# Altium PCB PCB1.PcbDoc (part 1 of 4)
Units mm, origin at the board's own origin, x right, y up, seen from the top; angles counter-clockwise.
Board outline 45.9 x 24.5 mm, 4 copper layers (Top Layer, Signal Layer 1, Signal Layer 2, Bottom Layer), stack 1.021 mm thick; 157 components, 126 nets, 564 pads, 199 vias.
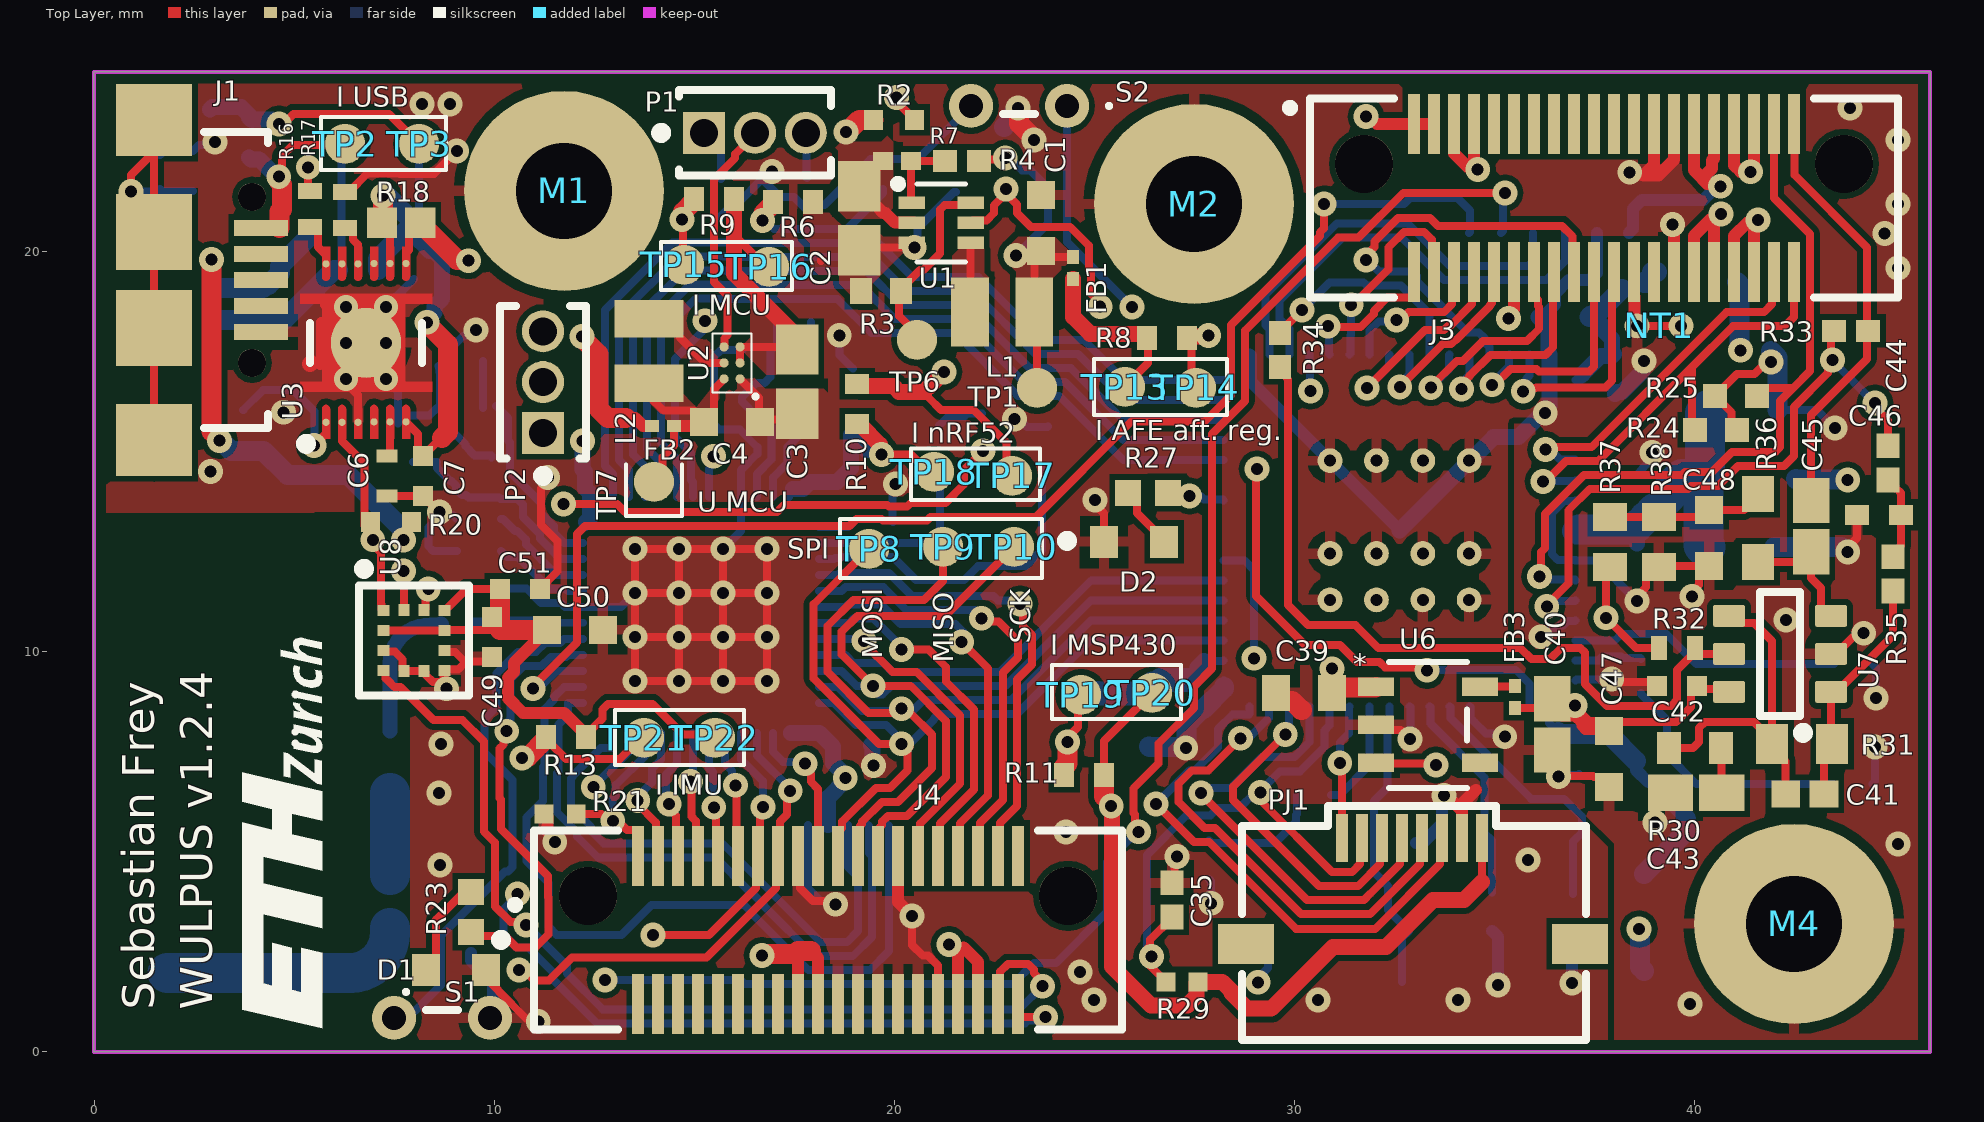
[diagram p0: Top Layer view]
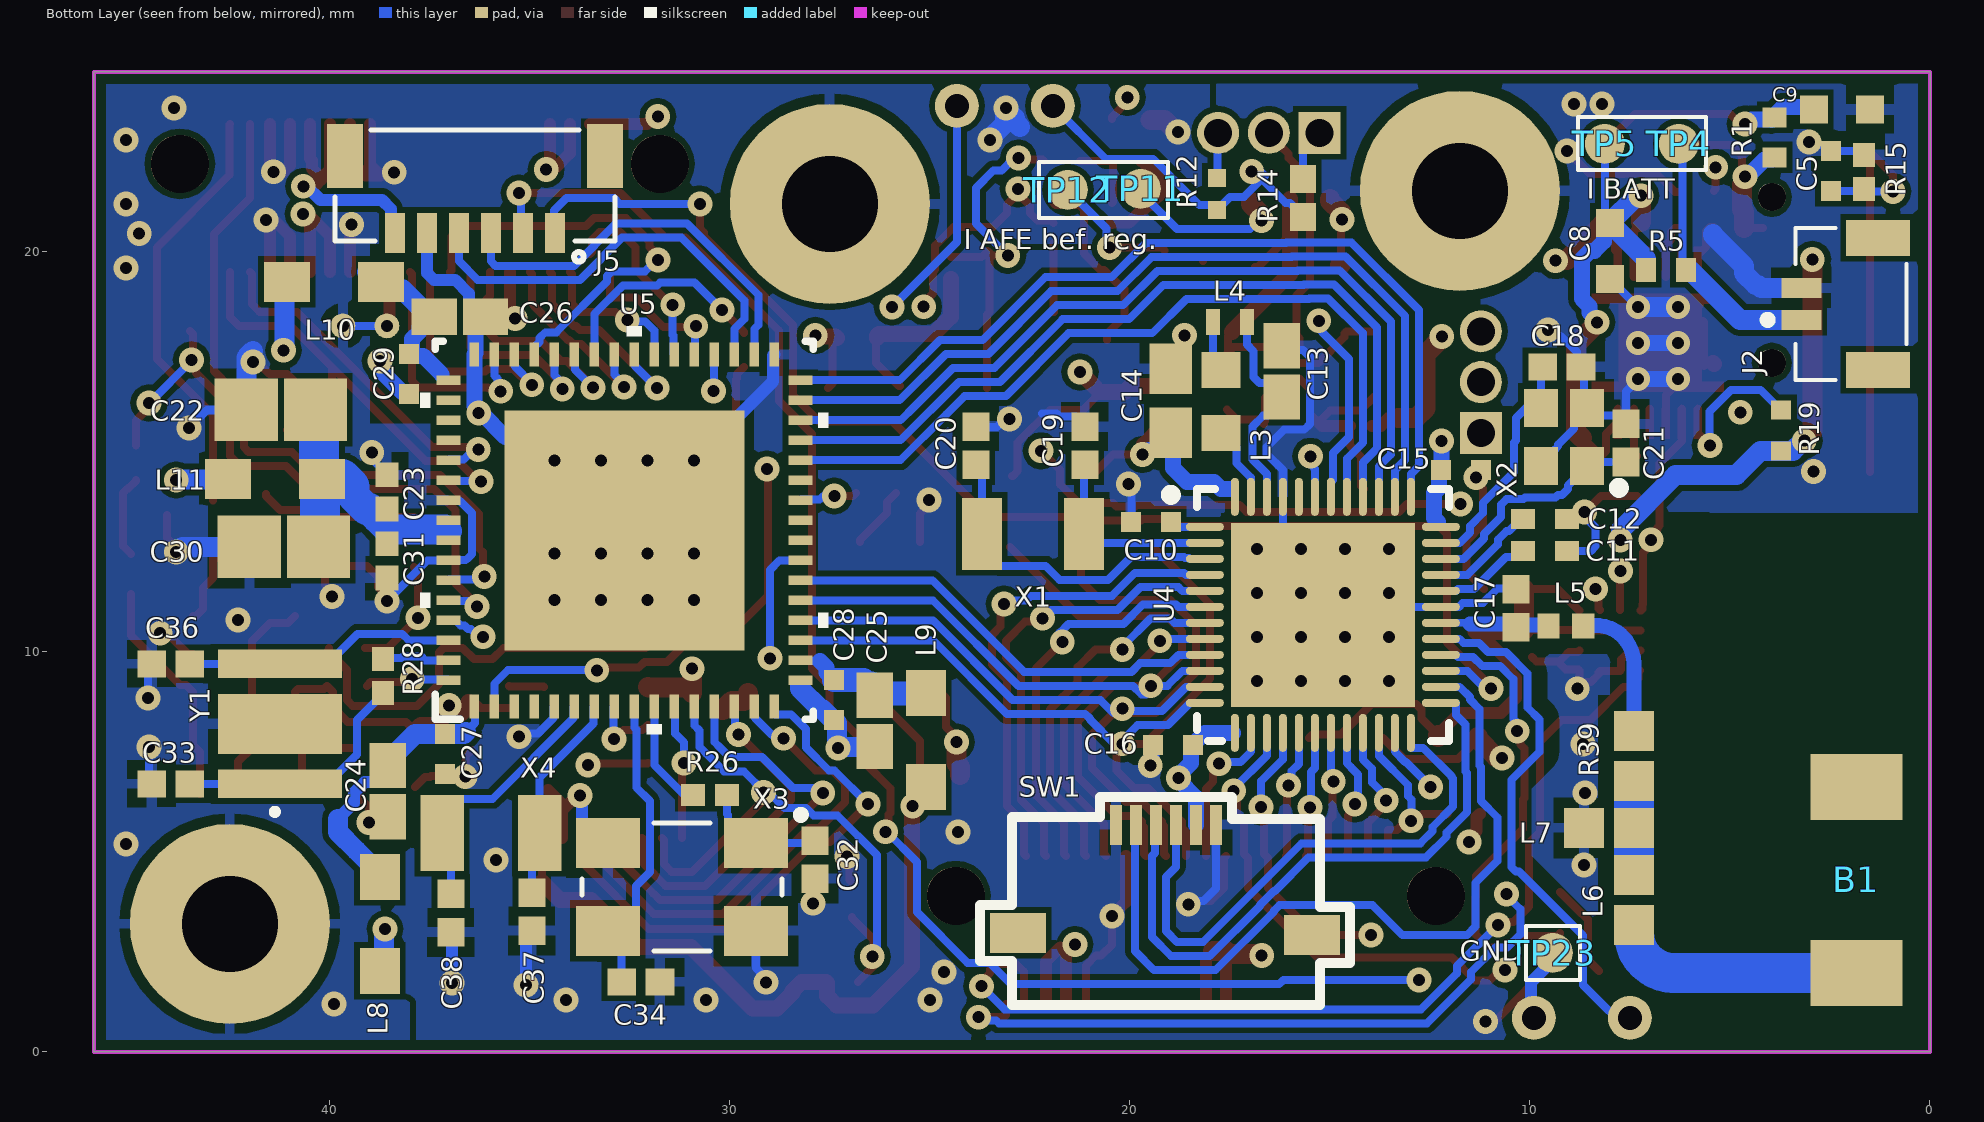
[diagram p1: Bottom Layer view, seen from below]
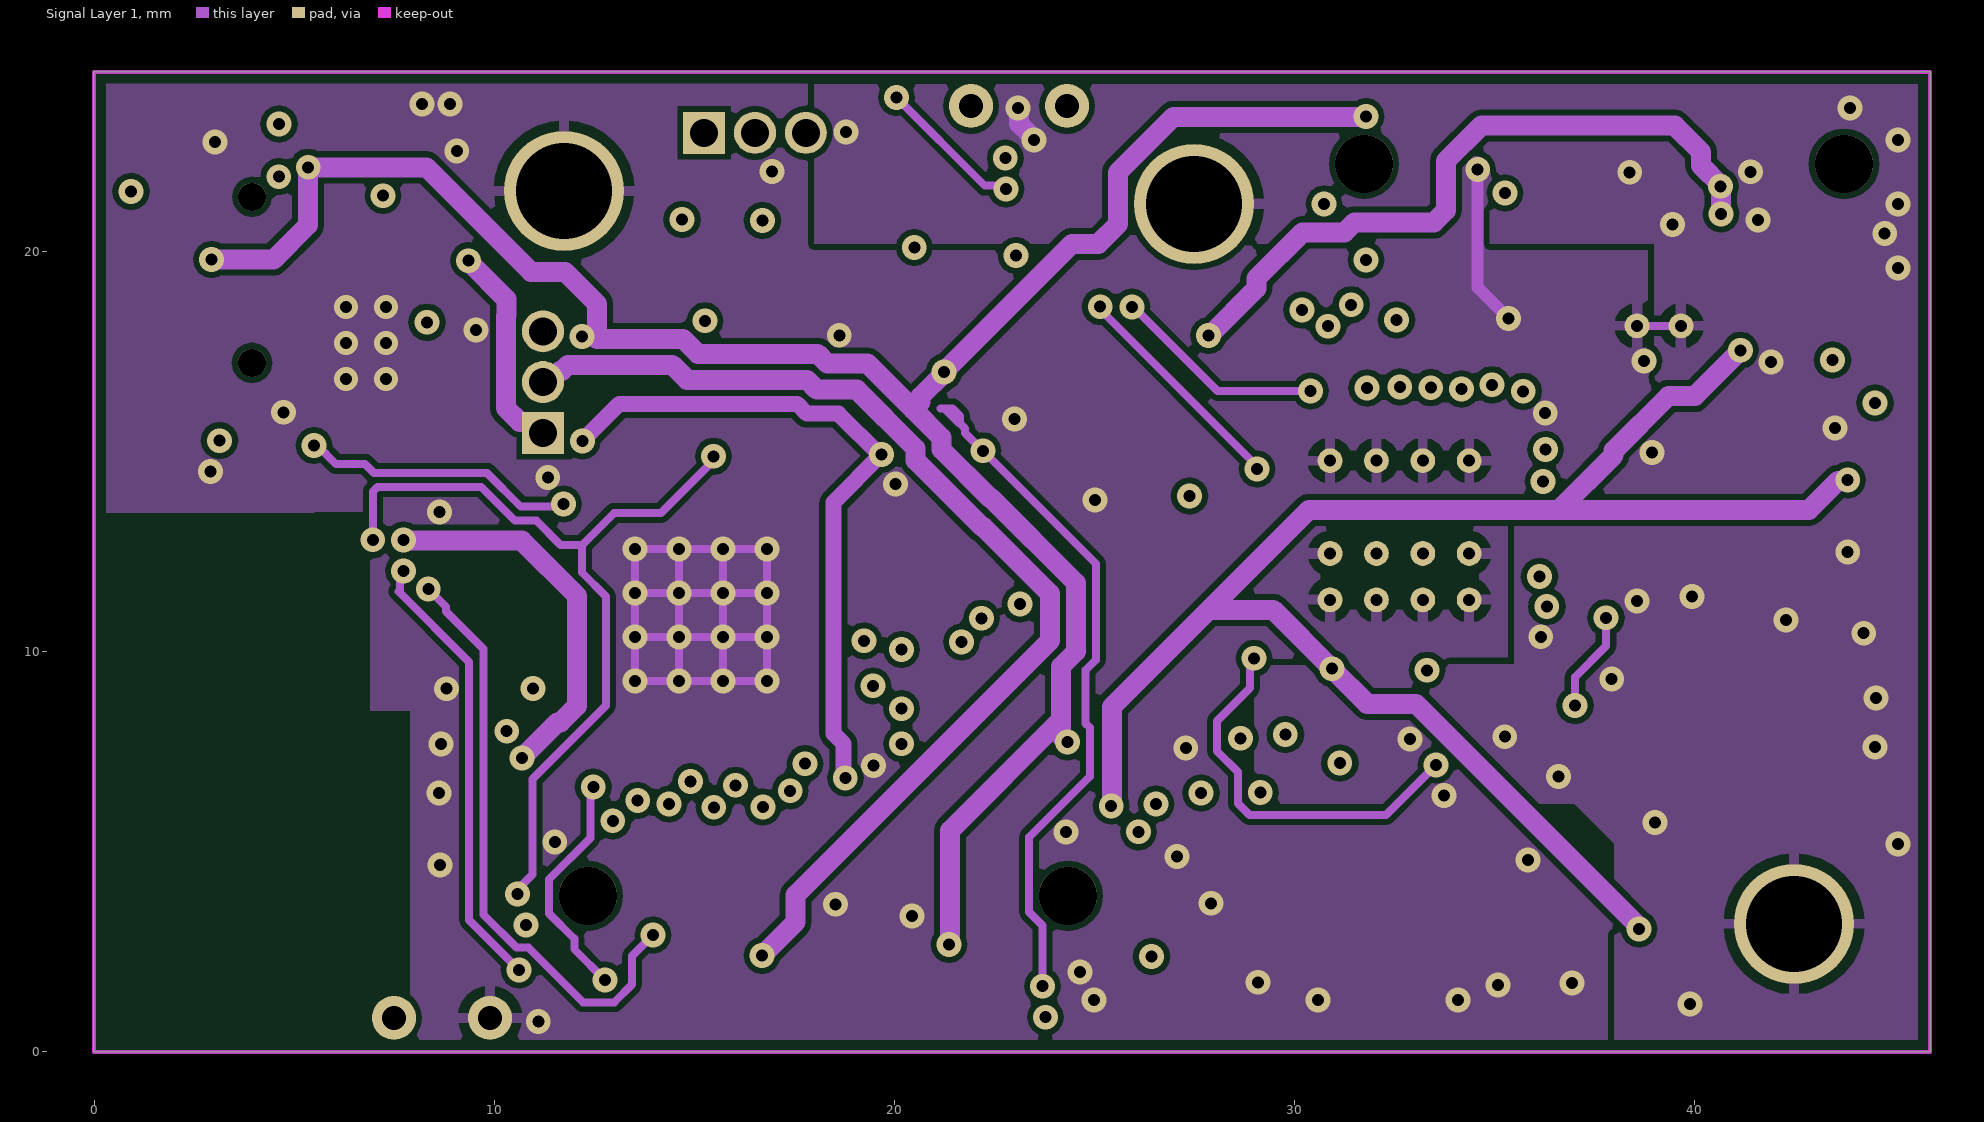
[diagram p2: Signal Layer 1]
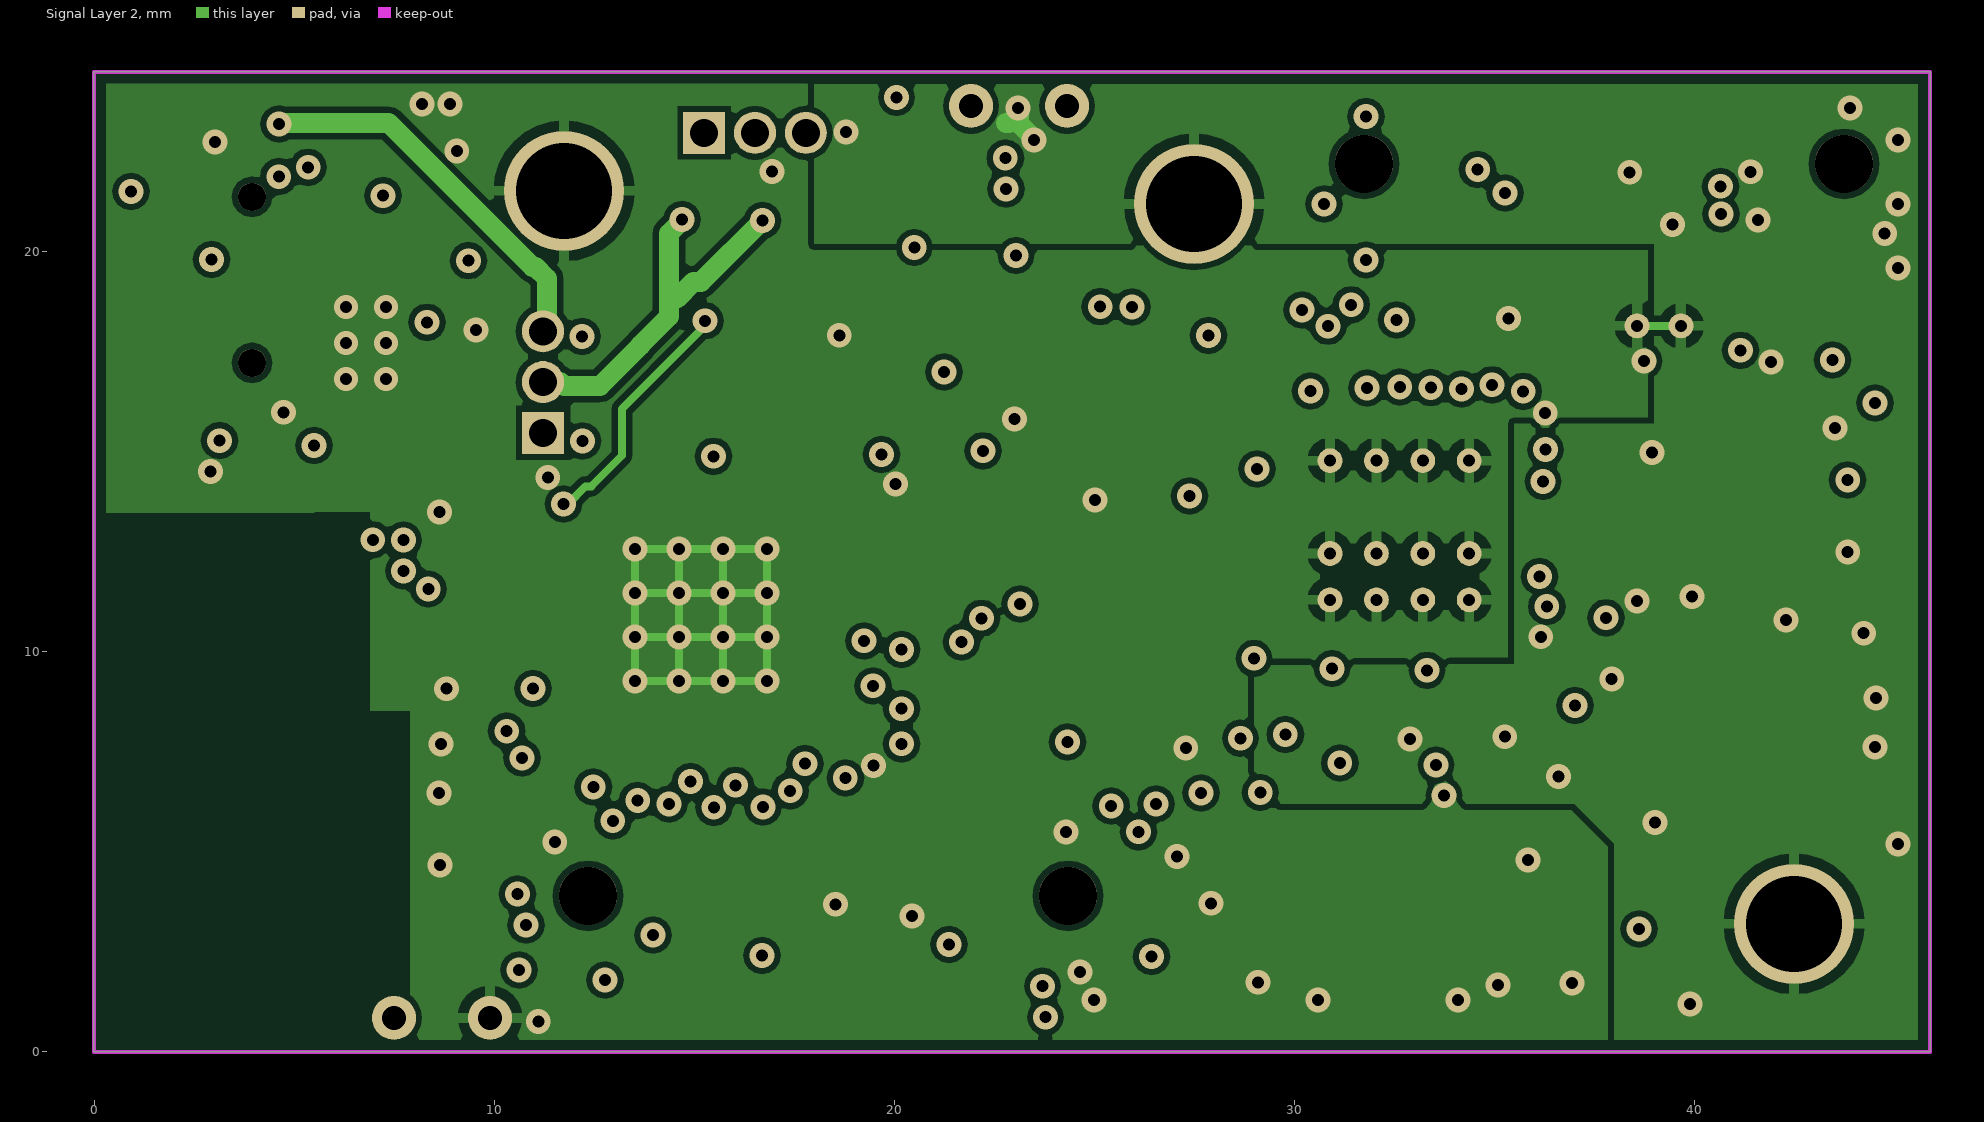
[diagram p3: Signal Layer 2]
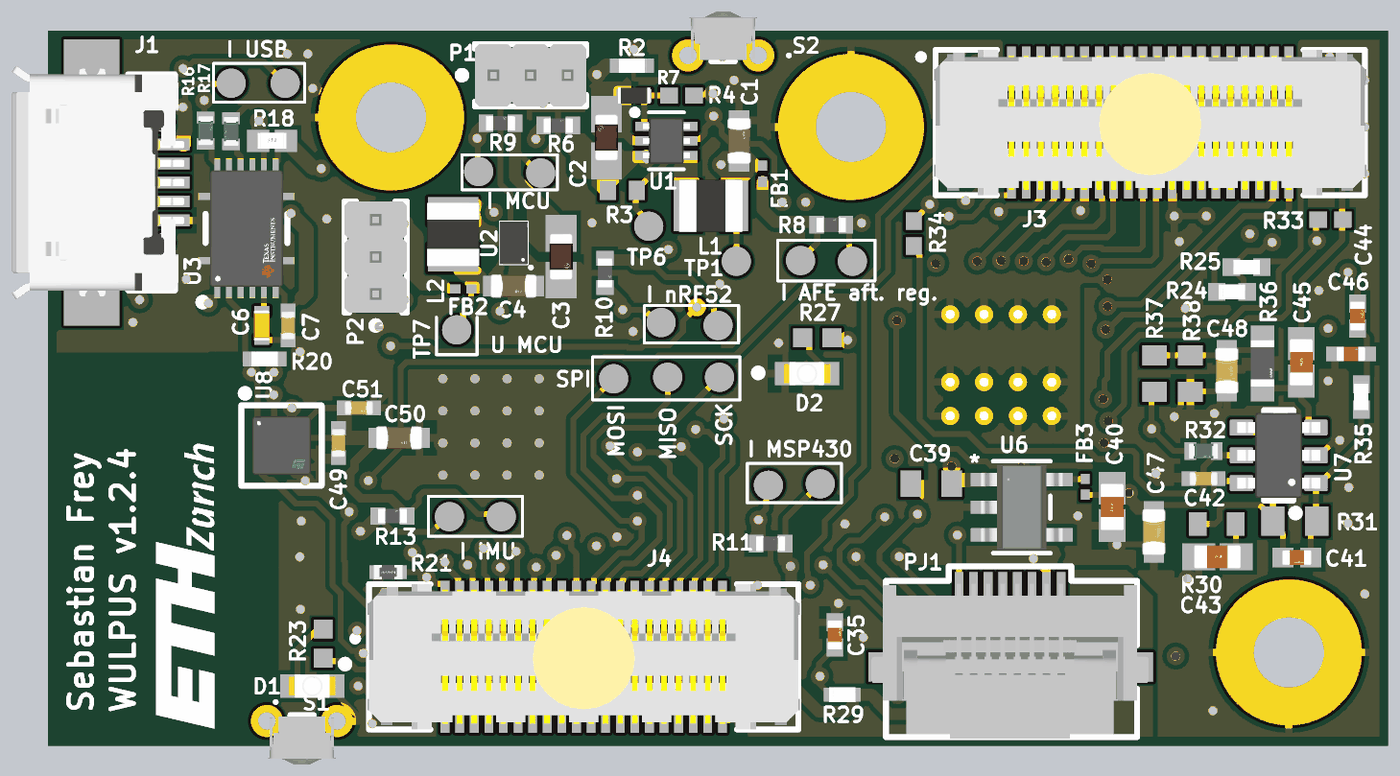
[diagram p6: 3D render of the assembled board from above, using the file's embedded part models]
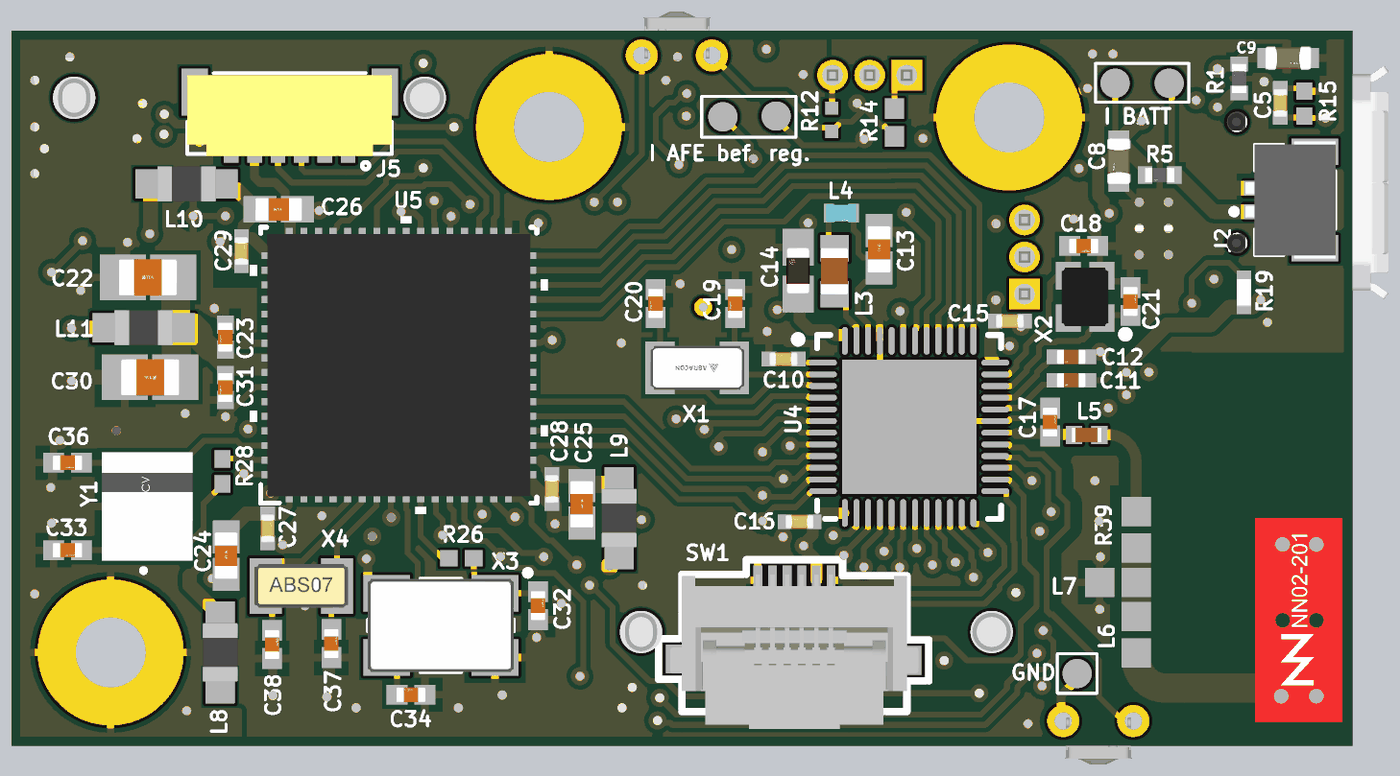
[diagram p7: 3D render of the assembled board from below, using the file's embedded part models]

## Layer stack, top to bottom
Top Solder: solder mask 0.0102, Solder Resist, Dk 3.5
Top Layer: signal copper 0.035
Dielectric 1: prepreg 0.2104, PP, Dk 4.36
Signal Layer 1: signal copper 0.0152
Dielectric 3: core 0.5, Core, Dk 4.6
Signal Layer 2: signal copper 0.0152
Dielectric 2: prepreg 0.2104, PP, Dk 4.36
Bottom Layer: signal copper 0.035
Bottom Solder: solder mask 0.0102, Solder Resist, Dk 3.5

## Board outline
-0.004,0 45.9,0 45.9,24.5 -0.004,24.5

## Design rules (kind name [scope] priority, off if disabled: settings)
BoardOutlineClearance [Not OnSilkscreen] p1: gap=0.3 ignorepadtopadclearanceinfootprint=FALSE
Clearance Clearance_polygon_rf [InNamedPolygon('NONET_L-01_P-001')] p1: gap=0.4 ignorepadtopadclearanceinfootprint=FALSE
Clearance Clearance_1 [All] p2: gap=0.15 ignorepadtopadclearanceinfootprint=FALSE except(0: Arc-Hole Track-Hole SMDPad-Hole THPad-Hole Via-Hole Text-Hole)
HoleSize [All] p1: absolutevalues=TRUE maxlimit=2.54 minlimit=0.2 maxpercent=80.000 minpercent=20.000
PolygonConnect PolygonConnect_9 [All vs IsNamedPolygon('VSYS_3V3_IN_L01_P022')] p1: connectstyle=Direct reliefconductorwidth=0.254 reliefentries=4 polygonreliefangle="90 Angle" airgapwidth=0.254
PolygonConnect PolygonConnect_8 [All vs IsNamedPolygon('USS_GND_L01_P021')] p2: connectstyle=Direct reliefconductorwidth=0.254 reliefentries=4 polygonreliefangle="90 Angle" airgapwidth=0.254
PolygonConnect PolygonConnect_7 [All vs IsNamedPolygon('NETL1_1_L01_P020')] p3: connectstyle=Direct reliefconductorwidth=0.254 reliefentries=4 polygonreliefangle="90 Angle" airgapwidth=0.254
PolygonConnect PolygonConnect_6 [All vs IsNamedPolygon('NETC1_1_L01_P019')] p4: connectstyle=Direct reliefconductorwidth=0.254 reliefentries=4 polygonreliefangle="90 Angle" airgapwidth=0.254
PolygonConnect PolygonConnect_5 [All vs IsNamedPolygon('NETL2_1_L01_P016')] p5: connectstyle=Direct reliefconductorwidth=0.254 reliefentries=4 polygonreliefangle="90 Angle" airgapwidth=0.254
PolygonConnect PolygonConnect_4 [All vs IsNamedPolygon('VSYS_MCU_IN_L01_P018')] p6: connectstyle=Direct reliefconductorwidth=0.254 reliefentries=4 polygonreliefangle="90 Angle" airgapwidth=0.254
PolygonConnect PolygonConnect_3 [All vs IsNamedPolygon('NETL2_1_L01_P016')] p7: thpad.connectstyle=Direct thpad.reliefconductorwidth=0.254 thpad.reliefentries=4 thpad.polygonreliefangle="90 Angle" thpad.airgapwidth=0.254 smdpad.connectstyle=Relief smdpad.reliefconductorwidth=0.254 smdpad.reliefentries=4 smdpad.polygonreliefangle="90 Angle" smdpad.airgapwidth=0.254 via.connectstyle=Relief via.reliefconductorwidth=0.254 via.reliefentries=4 via.polygonreliefangle="90 Angle" via.airgapwidth=0.254
PolygonConnect PolygonConnect_2 [All vs IsNamedPolygon('NETC4_1_L01_P015')] p8: connectstyle=Direct reliefconductorwidth=0.254 reliefentries=4 polygonreliefangle="90 Angle" airgapwidth=0.254
PolygonConnect PolygonConnect_1 [All vs IsNamedPolygon('GND_L01_P001')] p9: connectstyle=Direct reliefconductorwidth=0.254 reliefentries=4 polygonreliefangle="90 Angle" airgapwidth=0.254
PolygonConnect [All] p10: connectstyle=Relief reliefconductorwidth=0.254 reliefentries=4 polygonreliefangle="90 Angle" airgapwidth=0.254
RoutingVias [All] p1: holewidth=0.3 width=0.62 viastyle="Through Hole" minholewidth=0.3 minwidth=0.62 maxholewidth=0.3 maxwidth=0.62
SilkToSilkClearance [All] p1: silktosilkclearance=0.01
SilkToSolderMaskClearance [IsPad] p1: minsilkscreentomaskgap=0.01 clearancetoexposedcopper=TRUE
SolderMaskExpansion [All] p1: expansion=0.102 istentingtop=FALSE
Width [All] p1: maxlimit=25 minlimit=0.15 preferedwidth=0.2 toplayer_maxwidth=2.5 midlayer1_maxwidth=2.5 midlayer2_maxwidth=2.5 minimp=50.000000 maximp=50.000000 favimp=50.000000
27 further rules are at their usual default settings.

## Classes and differential pairs
component class 05_IMU: C49 C50 C51 U8
component class 04_MR_WOLF: J4
component class 03_MSP430_AFE: C39 C40 C41 C42 C43 C44 C45 C46 C47 C48 FB3 J3 R30 R31 R32 R33 R34 R35 R36 R37 R38 U6 U7
component class 02_MSP430: C22 C23 C24 C25 C26 C27 C28 C29 C30 C31 C32 C33 C34 C35 C36 C37 C38 D2 L8 L9 L10 L11 PJ1 R24 R25 R26 R27 R28 R29 S2 TP8 TP9 TP10 U5 X3 X4 Y1 Y2 Y3
component class 01_NRF52: B1 C10 C11 C12 C13 C14 C15 C16 C17 C18 C19 C20 C21 D1 J5 L3 L4 L5 L6 L7 R21 R23 R39 S1 SW1 U4 X1 X2
component class 00_POWER: C1 C2 C3 C4 C5 C6 C7 C8 C9 FB1 FB2 J1 J2 L1 L2 M1 M2 M4 NT1 P1 P2 R1 R2 R3 R4 R5 R6 R7 R8 R9 R10 R11 R12 R13 R14 R15 R16 R17 R18 R19 R20 TP1 TP2 TP3 TP4 TP5 TP6 TP7 TP11 TP12 TP13 TP14 TP15 TP16 TP17 TP18 TP19 TP20 TP21 TP22 TP23 U1 U2 U3

## Components (designator, comment, footprint, x,y, rotation, side; value= is the part's Value field where it differs from the comment)
B1 "NN02-201" NN02201 1.84,4.3 r90 bottom
C1 "C1608X5R1A106K080AC" FP-C1608-080-MFG 23.675,20.725 r90 top value=10uF
C2 "EMK107ABJ475KA-T" FP-0603-L_1_6_0_15-W_0_8-IPC_A 19.13,20.841 r90 top
C3 "EMK107ABJ475KA-T" FP-0603-L_1_6_0_15-W_0_8-IPC_A 17.575,16.755 r270 top
C4 "C1608X5R1A106K080AC" FP-C1608-080-MFG 15.95,15.75 r0 top value=10uF
C5 "CC0402KRX7R7BB104" FP-CC0402-MFG 2.475,22.025 r270 bottom value="100 nF"
C6 "C1005X5R1E474K050BB" CAPC1050X55X10LL05 7.325,14.4 r90 top
C7 "CC0402KRX5R5BB105" FP-CC0402-MFG 8.225,14.4 r270 top value="1 uF"
C8 "C1608X5R1A106K080AC" FP-C1608-080-MFG 8,20.025 r270 bottom value=10uF
C9 "C1608X5R1A106K080AC" FP-C1608-080-MFG 2.2,23.56 r180 bottom value=10uF
C10 "CC0402KRX7R7BB104" FP-CC0402-MFG 19.475,13.25 r0 bottom value="100 nF"
C11 "not mounted" FP-04025A101JAT2A-MFG 9.625,12.525 r0 bottom
C12 "04025A101JAT2A" FP-04025A101JAT2A-MFG 9.625,13.325 r0 bottom
C13 "C1608X7R1C105K080AC" FP-C1608-080-0_1-IPC_B 16.2,17.009 r270 bottom
C14 "EMK107ABJ475KA-T" FP-0603-L_1_6_0_15-W_0_8-IPC_A 18.975,16.277 r90 bottom
C15 "CC0402KRX7R7BB104" FP-CC0402-MFG 11.725,14.55 r180 bottom value="100 nF"
C16 "CC0402KRX7R7BB104" FP-CC0402-MFG 18.925,7.675 r0 bottom value="100 nF"
C17 "GJM1555C1HR80WB01D" FP-GJM155-0_05-IPC_A 10.35,11.09 r90 bottom
C18 "GJM1555C1H120GB01D" FP-GJM155-0_05-IPC_A 9.2,17.125 r180 bottom
C19 "GJM1555C1H120GB01D" FP-GJM155-0_05-IPC_A 21.125,15.154 r270 bottom
C20 "GJM1555C1H120GB01D" FP-GJM155-0_05-IPC_A 23.85,15.154 r270 bottom
C21 "GJM1555C1H120GB01D" FP-GJM155-0_05-IPC_A 7.6,15.225 r90 bottom
C22 "C2012X5R1A336M125AC" FP-C2012-125-0_2-IPC_A 41.225,16.05 r180 bottom
C23 "GRM1555C1H102JA01D" FP-GRM155-0_05-IPC_B 38.575,14 r270 bottom
C24 "C1608X7R1C105K080AC" FP-C1608-080-0_1-IPC_B 38.55,6.516 r270 bottom
C25 "C1608X7R1C105K080AC" FP-C1608-080-0_1-IPC_B 26.375,8.275 r270 bottom
C26 "C1608X7R1C105K080AC" FP-C1608-080-0_1-IPC_B 36.75,18.375 r180 bottom
C27 "CC0402KRX7R7BB104" FP-CC0402-MFG 37.125,7.45 r90 bottom value="100 nF"
C28 "CC0402KRX7R7BB104" FP-CC0402-MFG 27.4,8.8 r90 bottom value="100 nF"
C29 "CC0402KRX7R7BB104" FP-CC0402-MFG 38.025,16.95 r90 bottom value="100 nF"
C30 "C2012X5R1A336M125AC" FP-C2012-125-0_2-IPC_A 41.15,12.625 r0 bottom
C31 "GRM1555C1H102JA01D" FP-GRM155-0_05-IPC_B 38.575,12.275 r270 bottom
C32 "GJM1555C1H120GB01D" FP-GJM155-0_05-IPC_A 27.875,4.804 r90 bottom
C33 "GJM1555C1H120GB01D" FP-GJM155-0_05-IPC_A 43.979,6.7 r180 bottom
C34 "GJM1555C1H120GB01D" FP-GJM155-0_05-IPC_A 32.225,1.75 r0 bottom
C35 "GRM1555C1H102JA01D" FP-GRM155-0_05-IPC_B 26.95,3.8 r90 top
C36 "GJM1555C1H120GB01D" FP-GJM155-0_05-IPC_A 43.979,9.7 r180 bottom
C37 "GJM1555C1H120GB01D" FP-GJM155-0_05-IPC_A 34.95,3.504 r90 bottom
C38 "GJM1555C1H120GB01D" FP-GJM155-0_05-IPC_A 36.975,3.471 r90 bottom
C39 "C1608X5R1A106K080AC" CAPC0603(1608)100_L 30.25,8.975 r0 top value=10uF
C40 "C1608X7R1C105K080AC" FP-C1608-080-0_1-IPC_B 36.45,8.184 r90 top
C41 "GJM1555C1H120GB01D" FP-GJM155-0_05-IPC_A 42.771,6.45 r0 top
C42 "CC0402KRX7R7BB104" FP-CC0402-MFG 39.575,9.15 r180 top value="100 nF"
C43 "C1608X7R1C105K080AC" FP-C1608-080-0_1-IPC_B 40.05,6.475 r180 top
C44 "GRM1555C1H102JA01D" FP-GRM155-0_05-IPC_B 44.85,14.725 r90 top
C45 "C1608X7R1C105K080AC" FP-C1608-080-0_1-IPC_B 42.925,13.141 r270 top
C46 "04025A101JAT2A" FP-04025A101JAT2A-MFG 44.625,13.425 r0 top
C47 "GRM188R61C225KE15D" FP-CGA3E-0_3-0_1-MFG 37.875,7.325 r270 top
C48 "GRM188R61C225KE15D" FP-CGA3E-0_3-0_1-MFG 40.375,12.85 r270 top
C49 "CC0402KRX7R7BB104" FP-CC0402-MFG 9.95,10.375 r270 top value="100 nF"
C50 "C1608X5R1A106K080AC" FP-C1608-080-MFG 12.025,10.55 r0 top value=10uF
C51 "CC0402KRX7R7BB104" FP-CC0402-MFG 10.65,11.575 r0 top value="100 nF"
D1 "APHD1608LZGCK" FP-APHD1608LZGCK-MFG 9.05,2.05 r180 top
D2 "APHD1608LZGCK" FP-APHD1608LZGCK-MFG 26,12.75 r0 top
FB1 "BLM03AX800SN1D" MURA-BLM03-CHIP-2_V 24.475,19.6 r270 top
FB2 "BLM03AX800SN1D" MURA-BLM03-CHIP-2_V 14.225,15.65 r180 top
FB3 "BLM03AX800SN1D" MURA-BLM03-CHIP-2_V 35.525,8.875 r270 top
J1 "629105136821" 629105136821 1.5,19.3 r270 top
J2 "DF52-2S-0.8H(21)" DF522S08H21 2.325,18.7 r90 bottom
J3 "LSHM-120-02.5-L-DV-A-N-K-TR" SAMTEC_LSHM-120-XX.X-X-DV-A-N-XX 37.75,21.35 r180 top
J4 "LSHM-120-02.5-L-DV-A-N-K-TR" SAMTEC_LSHM-120-XX.X-X-DV-A-N-XX 18.35,3.05 r180 top
J5 "DF52-6S-0.8H(21)" HIROSE_DF52-6S-0.8H(21) 36.375,20.475 r0 bottom
L1 "DFE201612E-2R2M=P2" INDC2016X10L 22.705,18.5 r0 top value=2.2uH
L2 "DFE201612E-2R2M=P2" INDC2016X10L 13.875,17.52 r270 top value=2.2uH
L3 "L0603B100KDWFT" L0603B100KDWFT 17.725,16.26 r90 bottom
L4 "LQW15AN15NJ00D" FP-LQW15AN_00-W0_6-0_1-MFG 17.5,18.25 r180 bottom
L5 "LQG15HS3N9B02D" INDC1005X45N 9.1,10.65 r180 bottom
L6 "LQW15AN3N6G80D" Component_0402_0603 7.4,3.8 r270 bottom
L7 "LQW15AN3N6G80D" Component_0402_0603 8.025,5.6 r0 bottom
L8 "742792040" SMD-0805 38.75,3.2 r90 bottom
L9 "742792040" SMD-0805 25.1,7.8 r90 bottom
L10 "742792040" SMD-0805 39.9,19.25 r180 bottom
L11 "742792040" SMD-0805 41.375,14.325 r180 bottom
M1 "Mounting Hole for mr Wolf PCB" "Hole M2" 11.75,21.525 r0 top
M2 "Mounting Hole for AFE PCB" "Hole M2" 27.5,21.2 r0 top
M4 "Mounting Hole for AFE PCB" "Hole M2" 42.5,3.2 r0 top
NT1 "Net Tie" Net_Tie_Top_Bottom 39.175,18.15 r180 top net-tie
P1 "GRPB031VWVN-RC" SLIN-GRPB031VWVN-RC_V 16.525,22.975 r0 top
P2 "GRPB031VWVN-RC" SLIN-GRPB031VWVN-RC_V 11.225,16.745 r90 top
PJ1 "5051100892" MOLEX_5051100892 32.95,3.9 r180 top
R1 "ERJ-2BWFR100X" FP-CSR0402-MFG 3.88,22.86 r90 bottom
R2 "CR0402-JW-105GLF" FP-CR0402-MFG 20,23.3 r180 top
R3 "not mounted" RESC0402(1005)_N 19.675,19.025 r180 top value=499K
R4 "RC0402FR-07453KL" RESC1005X40X25NL05T10 21.7,22.275 r0 top
R5 "ERJ-2BWFR100X" FP-CSR0402-MFG 6.6,19.55 r0 bottom
R6 "ERJ-2BWFR100X" FP-CSR0402-MFG 17.475,21.25 r0 top
R7 "RMCF0402FT100K" RESC1005X40X25LL10T15 20.075,22.275 r0 top
R8 "ERJ-2BWFR100X" FP-CSR0402-MFG 26.825,17.85 r0 top
R9 "ERJ-2BWFR100X" FP-CSR0402-MFG 15.5,21.325 r0 top
R10 "ERJ-2BWFR100X" FP-CSR0402-MFG 19.075,16.2 r270 top
R11 "ERJ-2BWFR100X" FP-CSR0402-MFG 24.75,6.925 r0 top
R12 "CRCW0402267KFKED" RESC1005X40X25LL05T05 17.825,21.45 r90 bottom
R13 "ERJ-2BWFR100X" FP-CSR0402-MFG 11.8,7.875 r0 top
R14 "RC0402FR-0711K5L" RESC1005X40X25ML05T10 15.675,21.35 r90 bottom
R15 "RC0402JR-070RL" RESC1005X40X25NL05T10 1.65,22 r90 bottom
R16 "TNPW040210K0BEED" FP-TNPW0402-e3-MFG 5.4,21.075 r90 top value=10k
R17 "TNPW040210K0BEED" FP-TNPW0402-e3-MFG 6.275,21.05 r270 top value=10k
R18 "CSRF0402FT10L0" FP-CSRF0402-high-IPC_A 7.675,20.725 r0 top
R19 "CR0402-JW-105GLF" FP-CR0402-MFG 3.72,15.54 r90 bottom
R20 "CR0402-JW-105GLF" FP-CR0402-MFG 7.425,13.25 r180 top
R21 "" FP-ERJ2RK-IPC_C 11.652,5.95 r180 top
R23 "CPF0402B324RE1" RESC1005X35X20ML05T10 9.425,3.5 r90 top
R24 "CRCW04021M00FKED" FP-CRCW0402-e3-MFG 40.55,15.55 r0 top
R25 "CRCW04021M00FKED" FP-CRCW0402-e3-MFG 41.05,16.4 r180 top
R26 "RC0402JR-0722RL" RESC1005X40X25NL05T10 30.5,6.425 r0 bottom
R27 "CPF0402B324RE1" RESC1005X35X20ML05T10 26.35,13.975 r180 top
R28 "RC0402JR-0722RL" RESC1005X40X25NL05T10 38.675,9.4 r90 bottom
R29 "CRCW040247K0FKED" FP-CRCW0402-e3-IPC_C 27.2,1.75 r180 top
R30 "RC0603FR-07806RL" RESC1608X55X25LL10T15 40.025,7.6 r180 top
R31 "RC0603FR-071K82L" RESC1608X55X25ML10T15 42.7,7.7 r0 top
R32 "TNPW040210K0BEED" FP-TNPW0402-e3-MFG 39.575,10.1 r0 top value=10k
R33 "RC0402JR-070RL" RESC1005X40X25NL05T10 43.925,18.025 r0 top
R34 "RC0402JR-070RL" RESC1005X40X25NL05T10 29.65,17.55 r90 top
R35 "CR0402-J/-000GLF" FP-CR0402-IPC_B 44.975,11.95 r90 top
R36 "RC0603FR-0724K9L" FP-RC_L0603-MFG 41.6,13.1 r270 top value=24.9kΩ
R37 "RC0603FR-072ML" RESC1608X55X30LL15T15 37.9,12.75 r270 top
R38 "RC0603FR-072ML" RESC1608X55X30LL15T15 39.125,12.75 r90 top
R39 "CR0402-J/-000GLF" Component_0402_0603 7.4,7.4 r270 bottom
S1 "NanoT160BP" NanoT160BP 7.5,0.85 r0 top
S2 "NanoT160BP" NanoT160BP 24.325,23.65 r180 top
SW1 "5051100692" MOLEX_5051100692 21.1,2.875 r0 bottom
TP1 "TP-SM-C-100" TP-SM-C-100 23.575,16.6 r0 top
TP2 "TP-SM-C-100" TP-SM-C-100 6.275,22.7 r90 top
TP3 "TP-SM-C-100" TP-SM-C-100 8.125,22.7 r90 top
TP4 "TP-SM-C-100" TP-SM-C-100 6.275,22.7 r90 bottom
TP5 "TP-SM-C-100" TP-SM-C-100 8.125,22.7 r90 bottom
TP6 "TP-SM-C-100" TP-SM-C-100 20.575,17.8 r90 top
TP7 "TP-SM-C-100" TP-SM-C-100 14,14.25 r270 top
TP8 "TP-SM-C-100" TP-SM-C-100 19.375,12.575 r90 top
TP9 "TP-SM-C-100" TP-SM-C-100 21.225,12.625 r90 top
TP10 "TP-SM-C-100" TP-SM-C-100 23,12.625 r90 top
TP11 "TP-SM-C-100" TP-SM-C-100 19.725,21.575 r90 bottom
TP12 "TP-SM-C-100" TP-SM-C-100 21.55,21.55 r90 bottom
TP13 "TP-SM-C-100" TP-SM-C-100 25.775,16.625 r90 top
TP14 "TP-SM-C-100" TP-SM-C-100 27.55,16.6 r90 top
TP15 "TP-SM-C-100" TP-SM-C-100 14.75,19.675 r90 top
TP16 "TP-SM-C-100" TP-SM-C-100 16.875,19.625 r90 top
TP17 "TP-SM-C-100" TP-SM-C-100 22.95,14.4 r90 top
TP18 "TP-SM-C-100" TP-SM-C-100 21,14.5 r90 top
TP19 "TP-SM-C-100" TP-SM-C-100 24.675,8.925 r90 top
TP20 "TP-SM-C-100" TP-SM-C-100 26.45,8.975 r90 top
TP21 "TP-SM-C-100" TP-SM-C-100 13.75,7.85 r90 top
TP22 "TP-SM-C-100" TP-SM-C-100 15.525,7.85 r90 top
TP23 "TP-SM-C-100" TP-SM-C-100 9.425,2.475 r90 bottom
U1 "TLV62569PDRLR" TLV62569PDRLR 21.18,20.725 r0 top
U2 "TPS62840YBGR" BGA6C40P2X3_97X147X50 15.95,17.225 r180 top
U3 "BQ27441DRZT-G1B" DRZ0012A_MFG 6.8,17.725 r0 top
U4 "NRF52832-QFAA-R" NRSC-QF-48_M 15.175,10.925 r180 bottom
U5 "MSP430FR5043IRGCT" RGC0064G 32.64,13.04 r90 bottom
U6 "XC8102AA01MR-G" XC8102_SOT-25_TOR 33.351,8.175 r0 top
U7 "OPA836IDBVT" DBV0006A_L 42.15,9.95 r180 top
U8 "IIS2DHTR" FP-LGA-12-8365767-MFG 8,10.288 r0 top
X1 "ABS07AIG-32.768KHZ-9-1-T" Crys_Abracon_ABS07AIG-32_768KHZ-9-1-T_eec_MFG 22.425,12.95 r0 bottom
X2 "FA-128 32.0000MF10Z-AJ3" Crys_Seiko_Epson_Corporation_FA-128_32.0000MF10Z-AJ3_eec_0 9.15,15.375 r90 bottom
X3 "FY0800018" XTAL_ECS-80-18-30B-AGN-TR 31.2,4.125 r0 bottom
X4 "ABS07-32.768KHZ-9-T" XTAL320X150X90 35.975,5.475 r180 bottom
Y1 "AWSCR-8.00CV-T" AWSCR-8.00CV-T_ABR 41.25,8.2 r90 bottom

## Footprints (in the part's own frame and the unit in brackets; to place one, negate y for a bottom-side part, rotate by r counter-clockwise, add the part's x,y. Pads: shape width x height; smd on the part's side, far side on the other; paste and mask are expansions set on the pad)
629105136821 [mm] "Micro USB 2.0 SMT Type B Horizontal 5 Contacts"
  rect 0.4x1.35 smd: 1(-1.3,2.675) 2(-0.65,2.675) 3(0,2.675) 4(0.65,2.675) 5(1.3,2.675)
  round 0.7 hole 0.7 unplated: MH1(-2.075,2.45) MH2(2.075,2.45)
  rect 1.8x1.9 smd: Shell(-4,0) Shell(4,0)
  rect 1.9x1.9 smd: Shell(-1.2,0) Shell(1.2,0)
  silkscreen extent -3.7,1.25 3.7,2.85, body extent -4,-2.73 4,3.17, height 2.69
AWSCR-8.00CV-T_ABR [mil]
  rect 28x122 smd paste+0 mask+0: 1(-59.06,0) 3(59.06,0)
  rect 59x122 smd paste+0 mask+0: 2(0,0)
  silkscreen extent -90,2 -84,8, body extent -73,-61 73,61, height 48
BGA6C40P2X3_97X147X50 [mm] "BGA, 6-Leads, Body 0.97x1.47mmx0.50mm, Pitch 0.40mm"
  round 0.23 smd: A1(-0.2,0.4) A2(0.2,0.4) B1(-0.2,0) B2(0.2,0) C1(-0.2,-0.4) C2(0.2,-0.4)
  silkscreen extent -0.64,-0.73 0.49,0.89, body extent -0.49,-0.73 0.49,0.73, height 0.5
CAPC0603(1608)100_L [mm] "Chip Capacitor, Body 1.6x0.8mm, Height 1.0mm, IPC High Density"
  rect 0.7x0.9 smd: 1(-0.7,0) 2(0.7,0)
  body extent -0.87,-0.47 0.88,0.48, height 1
CAPC1050X55X10LL05 [mm] "Chip Capacitor, 2-Leads, Body 1.05x0.55mm, IPC High Density"
  rect 0.32x0.52 smd: 1(-0.5,0) 2(0.5,0)
  body extent -0.53,-0.28 0.53,0.28, height 0.55
Component_0402_0603 [mm]
  rect 1x1 smd mask+0: 1(-0.625,0) 2(0.625,0)
Crys_Abracon_ABS07AIG-32_768KHZ-9-1-T_eec_MFG [mm]
  rect 1x1.8 smd paste+0 mask+0: 1(-1.275,0) 2(1.275,0)
  body extent -1.6,-0.75 1.6,0.75, height 0.9
Crys_Seiko_Epson_Corporation_FA-128_32.0000MF10Z-AJ3_eec_0 [mm]
  rect 0.95x0.85 smd paste+0 mask+0: 1(-0.725,-0.575) 2(0.725,-0.575) 3(0.725,0.575) 4(-0.725,0.575)
  silkscreen extent -1.4,-1.5 -1.15,-1.25, body extent -1,-0.79 1,0.81, height 0.52
DBV0006A_L [mm] "SOT23, 6-Leads, Body 3.05x1.75mm, Pitch 0.95mm, IPC High Density"
  rrect18% 0.8x0.55 smd: 1(-1.275,0.95) 2(-1.275,0) 3(-1.275,-0.95) 4(1.275,-0.95) 5(1.275,0) 6(1.275,0.95)
  silkscreen extent -0.7,-1.55 0.5,2.1, body extent -1.42,-1.46 1.42,1.46, height 1.11
DF522S08H21 [mm]
  rect 0.5x1 smd: 1(-0.4,0.89) 2(0.4,0.89)
  rect 0.9x1.6 smd: 3(-1.65,-1.03) 4(1.65,-1.03)
  silkscreen extent -1.9,-1.74 1.9,1.83, body extent -2.01,-1.74 2.01,1.34, height 1.1
DRZ0012A_MFG [mm]
  round 0.18 smd paste-1000 mask+0: 1(-1,-1.985) 2(-0.6,-1.985) 3(-0.2,-1.985) 4(0.2,-1.975) 5(0.6,-1.975) 6(1,-1.975) 7(1,1.985) 8(0.6,1.985) 9(0.2,1.985) 10(-0.2,1.975) 11(-0.6,1.975) 12(-1,1.975)
  round 1.755 smd paste-1000 mask+0: 13(0,0)
  Top Layer region: 1.1,2.4 1.1,1.65 1.087,1.6 1.05,1.563 1,1.55 1,1.55 0.962,1.558 0.929,1.579 0.908,1.612 0.9,1.65 0.9,1.65 0.9,2.4
  Top Layer region: 0.7,2.4 0.7,1.65 0.692,1.612 0.671,1.579 0.638,1.558 0.6,1.55 0.6,1.55 0.562,1.558 0.529,1.579 0.508,1.612 0.5,1.65 0.5,1.65 0.5,2.4
  Top Layer region: 0.3,2.4 0.3,1.65 0.292,1.612 0.271,1.579 0.238,1.558 0.2,1.55 0.2,1.55 0.162,1.558 0.129,1.579 0.108,1.612 0.1,1.65 0.1,1.65 0.1,2.4
  Top Layer region: -0.1,2.4 -0.1,1.65 -0.108,1.612 -0.129,1.579 -0.162,1.558 -0.2,1.55 -0.2,1.55 -0.238,1.558 -0.271,1.579 -0.292,1.612 -0.3,1.65 -0.3,1.65 -0.3,2.4
  Top Layer region: 0.9,-2.4 0.9,-1.65 0.908,-1.612 0.929,-1.579 0.962,-1.558 1,-1.55 1,-1.55 1.038,-1.558 1.071,-1.579 1.092,-1.612 1.1,-1.65 1.1,-1.65 1.1,-2.4
  Top Layer region: 0.5,-2.4 0.5,-1.65 0.508,-1.612 0.529,-1.579 0.562,-1.558 0.6,-1.55 0.6,-1.55 0.638,-1.558 0.671,-1.579 0.692,-1.612 0.7,-1.65 0.7,-1.65 0.7,-2.4
  Top Layer region: 0.1,-2.4 0.1,-1.65 0.108,-1.612 0.129,-1.579 0.162,-1.558 0.2,-1.55 0.2,-1.55 0.238,-1.558 0.271,-1.579 0.292,-1.612 0.3,-1.65 0.3,-1.65 0.3,-2.4
  Top Layer region: -0.3,-2.4 -0.3,-1.65 -0.292,-1.612 -0.271,-1.579 -0.238,-1.558 -0.2,-1.55 -0.2,-1.55 -0.162,-1.558 -0.129,-1.579 -0.108,-1.612 -0.1,-1.65 -0.1,-1.65 -0.1,-2.4
  Top Layer region: -0.5,2.4 -0.5,1.65 -0.508,1.612 -0.529,1.579 -0.562,1.558 -0.6,1.55 -0.6,1.55 -0.638,1.558 -0.671,1.579 -0.692,1.612 -0.7,1.65 -0.7,1.65 -0.7,2.4
  Top Layer region: -0.9,2.4 -0.9,1.65 -0.908,1.612 -0.929,1.579 -0.962,1.558 -1,1.55 -1,1.55 -1.038,1.558 -1.071,1.579 -1.092,1.612 -1.1,1.65 -1.1,1.65 -1.1,2.4
  Top Layer region: -0.7,-2.4 -0.7,-1.65 -0.692,-1.612 -0.671,-1.579 -0.638,-1.558 -0.6,-1.55 -0.6,-1.55 -0.562,-1.558 -0.529,-1.579 -0.508,-1.612 -0.5,-1.65 -0.5,-1.65 -0.5,-2.4
  Top Layer region: -1.1,-2.4 -1.1,-1.65 -1.092,-1.612 -1.071,-1.579 -1.038,-1.558 -1,-1.55 -1,-1.55 -0.962,-1.558 -0.929,-1.579 -0.908,-1.612 -0.9,-1.65 -0.9,-1.65 -0.9,-2.4
  Top Layer region: -1.65,1.225 1.65,1.225 1.65,0.975 0.975,0.975 0.975,-0.975 1.65,-0.975 1.65,-1.225 -1.65,-1.225 -1.65,-0.975 -0.975,-0.975 -0.975,0.975 -1.65,0.975
  silkscreen extent -1.62,-2.65 1.4,0.5, body extent -1.75,-2.5 1.75,2.5, height 0.25
FP-0603-L_1_6_0_15-W_0_8-IPC_A [mm]
  rect 1.258x1.062 smd paste+0 mask+0: 1(-0.802,0) 2(0.802,0)
  body extent -1.93,-1.03 1.93,1.03, height 0.25
FP-04025A101JAT2A-MFG [mm]
  rect 0.6x0.5 smd paste+0 mask+0: 1(-0.55,0) 2(0.55,0)
  body extent -0.5,-0.25 0.5,0.25, height 0.56
FP-APHD1608LZGCK-MFG [mm]
  rect 0.7x0.8 smd paste+0 mask+0: 1(-0.75,0) 2(0.75,0)
  silkscreen extent -1.25,-0.87 -1,-0.63, body extent -0.8,-0.4 0.8,0.4, height 0.8
FP-C1608-080-0_1-IPC_B [mm]
  rect 1.131x0.912 smd paste+0 mask+0: 1(-0.641,0) 2(0.641,0)
  body extent -0.8,-0.4 0.8,0.4, height 0.9
FP-C1608-080-MFG [mm]
  rect 0.7x0.7 smd paste+0 mask+0: 1(-0.7,0) 2(0.7,0)
  body extent -1.15,-0.55 1.15,0.55, height 0.25
FP-C2012-125-0_2-IPC_A [mm]
  rect 1.578x1.556 smd paste+0 mask+0: 1(-0.864,0) 2(0.864,0)
  body extent -1,-0.63 1,0.63, height 1.45
FP-CC0402-MFG [mm]
  rect 0.5x0.5 smd paste+0 mask+0: 1(-0.5,0) 2(0.5,0)
  body extent -0.5,-0.25 0.5,0.25, height 0.55
FP-CGA3E-0_3-0_1-MFG [mm]
  rect 0.7x0.7 smd paste+0 mask+0: 1(-0.7,0) 2(0.7,0)
  body extent -1.15,-0.65 1.15,0.65, height 0.25
FP-CR0402-IPC_B [mm]
  rect 0.615x0.572 smd paste+0 mask+0: 1(-0.429,0) 2(0.429,0)
  body extent -0.89,-0.44 0.89,0.44, height 0.25
FP-CR0402-MFG [mm]
  rect 0.475x0.5 smd paste+0 mask+0: 1(-0.512,0) 2(0.513,0)
  body extent -0.85,-0.38 0.85,0.38, height 0.25
FP-CRCW0402-e3-IPC_C [mm]
  rect 0.468x0.472 smd paste+0 mask+0: 1(-0.402,0) 2(0.402,0)
  body extent -0.74,-0.38 0.74,0.38, height 0.25
FP-CRCW0402-e3-MFG [mm]
  rect 0.6x0.6 smd paste+0 mask+0: 1(-0.525,0) 2(0.525,0)
  body extent -0.92,-0.4 0.92,0.4, height 0.25
FP-CSR0402-MFG [mm]
  rect 0.5x0.6 smd paste+0 mask+0: 1(-0.5,0) 2(0.5,0)
  body extent -0.5,-0.25 0.5,0.25, height 0.42
FP-CSRF0402-high-IPC_A [mm]
  rect 0.76x0.762 smd paste+0 mask+0: 1(-0.476,0) 2(0.476,0)
  body extent -1.06,-0.58 1.06,0.58, height 0.25
FP-ERJ2RK-IPC_C [mm]
  rect 0.468x0.472 smd paste+0 mask+0: 1(-0.402,0) 2(0.402,0)
  body extent -0.5,-0.25 0.5,0.25, height 0.4
FP-GJM155-0_05-IPC_A [mm]
  rect 0.715x0.672 smd paste+0 mask+0: 1(-0.479,0) 2(0.479,0)
  body extent -0.5,-0.25 0.5,0.25, height 0.55
FP-GRM155-0_05-IPC_B [mm]
  rect 0.615x0.572 smd paste+0 mask+0: 1(-0.429,0) 2(0.429,0)
  body extent -0.5,-0.25 0.5,0.25, height 0.55
FP-LGA-12-8365767-MFG [mm]
  rect 0.305x0.28 smd paste+0 mask+0: 1(-0.763,0.75) 2(-0.763,0.25) 3(-0.763,-0.25) 4(-0.763,-0.75) 7(0.763,-0.75) 8(0.763,-0.25) 9(0.763,0.25) 10(0.763,0.75)
  rect 0.28x0.305 smd paste+0 mask+0: 5(-0.25,-0.763) 6(0.25,-0.763) 11(0.25,0.763) 12(-0.25,0.763)
  silkscreen extent -1.38,-1.38 1.38,1.91, body extent -1.58,-1.58 1.58,1.58, height 0.25
FP-LQW15AN_00-W0_6-0_1-MFG [mm]
  rect 0.35x0.65 smd paste+0 mask+0: 1(-0.425,0) 2(0.425,0)
  body extent -0.5,-0.3 0.5,0.3, height 0.6
FP-RC_L0603-MFG [mm]
  rect 0.9x0.8 smd paste+0 mask+0: 1(-0.85,0) 2(0.85,0)
  body extent -1.4,-0.55 1.4,0.55, height 0.25
FP-TNPW0402-e3-MFG [mm]
  rect 0.4x0.6 smd paste+0 mask+0: 1(-0.45,0) 2(0.45,0)
  body extent -0.75,-0.4 0.75,0.4, height 0.25
HIROSE_DF52-6S-0.8H(21) [mm]
  rect 0.5x1 smd: 1(-2,0) 2(-1.2,0) 3(-0.4,0) 4(0.4,0) 5(1.2,0) 6(2,0)
  rect 0.9x1.6 smd: S1(-3.25,-1.92) S2(3.25,-1.92)
  silkscreen extent -3.5,-2.57 3.5,0.72, body extent -3.5,-2.5 3.5,0.27, height 1.76
"Hole M2" [mm] "Plated Thru-Hole, M2 (2.4mm hole, 5mm pad)"
  round 5 / inner round 3 / far side round 5 hole 2.4: 1(0,0)
INDC1005X45N [mm]
  rect 0.56x0.63 smd: 1(-0.435,0) 2(0.435,0)
  body extent -0.5,-0.25 0.5,0.25, height 0.46
INDC2016X10L [mm] "Chip Inductor, 2-Leads, Body 2.05x1.65mm, IPC High Density"
  rect 0.94x1.73 smd: 1(-0.805,0) 2(0.805,0)
  body extent -1.1,-0.9 1.1,0.9, height 1
L0603B100KDWFT [mm]
  rect 0.9x0.97 smd: 1(-0.785,0) 2(0.785,0)
  body extent -0.8,-0.47 0.8,0.48, height 0.81
MOLEX_5051100692 [mm]
  rect 1.4x1 smd: 0(-5.65,-0.05) 0(1.7,-0.1)
  rect 0.3x1 smd: 1(-3.25,-2.8) 2(-2.75,-2.8) 3(-2.25,-2.8) 4(-1.75,-2.8) 5(-1.25,-2.8) 6(-0.75,-2.8)
  silkscreen extent -6.6,-3.5 2.65,1.7, body extent -6.25,-3 2.25,2.3, height 1.88
MOLEX_5051100892 [mm]
  rect 1.4x1 smd: 0(-4.2,1.2) 0(4.15,1.2)
  rect 0.3x1.2 smd: 1(-1.75,-1.45) 2(-1.25,-1.45) 3(-0.75,-1.45) 4(-0.25,-1.45) 5(0.25,-1.45) 6(0.75,-1.45) 7(1.25,-1.45) 8(1.75,-1.45)
  silkscreen extent -4.35,-2.25 4.25,3.6, body extent -4.75,-1.65 4.75,3.65, height 1.88
MURA-BLM03-CHIP-2_V [mm] "Chip Ferrite Bead, 2-Leads, Body 0.6x0.3mm, Height 0.33mm, Reflow, 0.9A max Rated Current"
  rect 0.35x0.3 smd: 1(-0.275,0) 2(0.275,0)
  body extent -0.3,-0.15 0.3,0.15, height 0.33
NanoT160BP [mm]
  round 1.1 hole 0.6: 1(0,0) 2(2.4,0)
  silkscreen extent 0.25,0.2 1.6,0.7, body extent 0.05,-1.5 2.35,0.15, height 0.46
Net_Tie_Top_Bottom [mm]
  round 0.62 hole 0.3 mask+0.102: 1(-0.5,0) 2(0.6,0)
  Multi-Layer region: -0.225,-0.1 0.325,-0.1 0.325,0.1 -0.225,0.1
NN02201 [mm]
  rect 1.65x2.3 smd: 1(-2.325,0) 2(2.325,0)
  body extent -3.5,-1.5 3.5,1.5, height 1.03
NRSC-QF-48_M [mm] "QFN, 48-Leads, Body 6.00x6.00mm, Pitch 0.40mm, Thermal Pad 4.60x4.60mm, IPC Low Density"
  oval 0.95x0.2 smd: 1(-2.95,2.2) 2(-2.95,1.8) 3(-2.95,1.4) 4(-2.95,1) 5(-2.95,0.6) 6(-2.95,0.2) 7(-2.95,-0.2) 8(-2.95,-0.6) 9(-2.95,-1) 10(-2.95,-1.4) 11(-2.95,-1.8) 12(-2.95,-2.2) 25(2.95,-2.2) 26(2.95,-1.8) 27(2.95,-1.4) 28(2.95,-1) 29(2.95,-0.6) 30(2.95,-0.2) 31(2.95,0.2) 32(2.95,0.6) 33(2.95,1) 34(2.95,1.4) 35(2.95,1.8) 36(2.95,2.2)
  oval 0.2x0.95 smd: 13(-2.2,-2.95) 14(-1.8,-2.95) 15(-1.4,-2.95) 16(-1,-2.95) 17(-0.6,-2.95) 18(-0.2,-2.95) 19(0.2,-2.95) 20(0.6,-2.95) 21(1,-2.95) 22(1.4,-2.95) 23(1.8,-2.95) 24(2.2,-2.95) 37(2.2,2.95) 38(1.8,2.95) 39(1.4,2.95) 40(1,2.95) 41(0.6,2.95) 42(0.2,2.95) 43(-0.2,2.95) 44(-0.6,2.95) 45(-1,2.95) 46(-1.4,2.95) 47(-1.8,2.95) 48(-2.2,2.95)
  rect 4.6x4.6 smd: 49(0,0)
  silkscreen extent -3.93,-3.15 3.15,3.15, body extent -3,-3 3,3, height 0.9
RESC0402(1005)_N [mm] "Chip Resistor, Body 1.0x0.5mm, IPC Medium Density"
  rect 0.55x0.65 smd: 1(-0.5,0) 2(0.5,0)
  body extent -0.52,-0.27 0.53,0.28, height 0.4
RESC1005X35X20ML05T10 [mm] "Chip Resistor, 2-Leads, Body 1.00x0.50mm, IPC Low Density"
  rect 0.65x0.65 smd: 1(-0.5,0) 2(0.5,0)
  body extent -0.53,-0.27 0.53,0.28, height 0.35
RESC1005X40X25LL05T05 [mm] "Chip Resistor, 2-Leads, Body 1.00x0.50mm, IPC High Density"
  rect 0.45x0.45 smd: 1(-0.4,0) 2(0.4,0)
  body extent -0.53,-0.27 0.53,0.28, height 0.4
RESC1005X40X25LL10T15 [mm] "Chip Resistor, 2-Leads, Body 1.1x0.55mm, IPC High Density"
  rect 0.5x0.45 smd: 1(-0.35,0) 2(0.35,0)
  body extent -0.55,-0.28 0.55,0.28, height 0.4
RESC1005X40X25ML05T10 [mm] "Chip Resistor, 2-Leads, Body 1.00x0.50mm, IPC Low Density"
  rect 0.7x0.65 smd: 1(-0.475,0) 2(0.475,0)
  body extent -0.53,-0.27 0.53,0.28, height 0.4
RESC1005X40X25NL05T10 [mm] "Chip Resistor, 2-Leads, Body 1.00x0.50mm, IPC Medium Density"
  rect 0.6x0.55 smd: 1(-0.425,0) 2(0.425,0)
  body extent -0.53,-0.27 0.53,0.28, height 0.4
RESC1608X55X25LL10T15 [mm] "Chip Resistor, 2-Leads, Body 1.60x0.80mm, IPC High Density"
  rect 0.6x0.8 smd: 1(-0.65,0) 2(0.65,0)
  body extent -0.85,-0.45 0.85,0.45, height 0.55
RESC1608X55X25ML10T15 [mm] "Chip Resistor, 2-Leads, Body 1.60x0.80mm, IPC Low Density"
  rect 0.8x1 smd: 1(-0.75,0) 2(0.75,0)
  body extent -0.85,-0.45 0.85,0.45, height 0.55
RESC1608X55X30LL15T15 [mm] "Chip Resistor, 2-Leads, Body 1.60x0.80mm, IPC High Density"
  rect 0.7x0.85 smd: 1(-0.625,0) 2(0.625,0)
  body extent -0.87,-0.48 0.87,0.48, height 0.55
RGC0064G [mm]
  rect 0.6x0.24 smd paste+0 mask+0: 1(-4.4,3.75) 2(-4.4,3.25) 3(-4.4,2.75) 4(-4.4,2.25) 5(-4.4,1.75) 6(-4.4,1.25) 7(-4.4,0.75) 8(-4.4,0.25) 9(-4.4,-0.25) 10(-4.4,-0.75) 11(-4.4,-1.25) 12(-4.4,-1.75) 13(-4.4,-2.25) 14(-4.4,-2.75) 15(-4.4,-3.25) 16(-4.4,-3.75) 33(4.4,-3.75) 34(4.4,-3.25) 35(4.4,-2.75) 36(4.4,-2.25) 37(4.4,-1.75) 38(4.4,-1.25) 39(4.4,-0.75) 40(4.4,-0.25) 41(4.4,0.25) 42(4.4,0.75) 43(4.4,1.25) 44(4.4,1.75) 45(4.4,2.25) 46(4.4,2.75) 47(4.4,3.25) 48(4.4,3.75)
  rect 0.24x0.6 smd paste+0 mask+0: 17(-3.751,-4.4) 18(-3.251,-4.4) 19(-2.751,-4.4) 20(-2.251,-4.4) 21(-1.75,-4.4) 22(-1.25,-4.4) 23(-0.75,-4.4) 24(-0.25,-4.4) 25(0.25,-4.4) 26(0.75,-4.4) 27(1.25,-4.4) 28(1.75,-4.4) 29(2.251,-4.4) 30(2.751,-4.4) 31(3.251,-4.4) 32(3.751,-4.4) 49(3.751,4.4) 50(3.251,4.4) 51(2.751,4.4) 52(2.251,4.4) 53(1.75,4.4) 54(1.25,4.4) 55(0.75,4.4) 56(0.25,4.4) 57(-0.25,4.4) 58(-0.75,4.4) 59(-1.25,4.4) 60(-1.75,4.4) 61(-2.251,4.4) 62(-2.751,4.4) 63(-3.251,4.4) 64(-3.751,4.4)
  round 0.62 hole 0.3 mask+0: 65(-1.74,-1.74) 65(-1.74,-0.58) 65(-1.74,0.58) 65(-1.74,1.74) 65(-0.58,-1.74) 65(-0.58,-0.58) 65(-0.58,0.58) 65(-0.58,1.74) 65(1.74,-1.74) 65(1.74,-0.58) 65(1.74,0.58) 65(1.74,1.74)
  rect 6x6 smd paste-3 mask+0: 65(0,0)
  silkscreen extent -5.1,-5.1 5.1,5.1, body extent -4.5,-4.5 4.5,4.5, height 1
SAMTEC_LSHM-120-XX.X-X-DV-A-N-XX [mm]
  rect 0.3x1.5 smd: 01(4.75,-1.85) 02(4.75,1.85) 03(4.25,-1.85) 04(4.25,1.85) 05(3.75,-1.85) 06(3.75,1.85) 07(3.25,-1.85) 08(3.25,1.85) 09(2.75,-1.85) 10(2.75,1.85) 11(2.25,-1.85) 12(2.25,1.85) 13(1.75,-1.85) 14(1.75,1.85) 15(1.25,-1.85) 16(1.25,1.85) 17(0.75,-1.85) 18(0.75,1.85) 19(0.25,-1.85) 20(0.25,1.85) 21(-0.25,-1.85) 22(-0.25,1.85) 23(-0.75,-1.85) 24(-0.75,1.85) 25(-1.25,-1.85) 26(-1.25,1.85) 27(-1.75,-1.85) 28(-1.75,1.85) 29(-2.25,-1.85) 30(-2.25,1.85) 31(-2.75,-1.85) 32(-2.75,1.85) 33(-3.25,-1.85) 34(-3.25,1.85) 35(-3.75,-1.85) 36(-3.75,1.85) 37(-4.25,-1.85) 38(-4.25,1.85) 39(-4.75,-1.85) 40(-4.75,1.85)
  round 1.45 hole 1.45 unplated: ""(-6,-0.85) ""(6,-0.85)
  silkscreen extent -7.35,-2.49 7.95,2.49, body extent -7.4,-2.49 7.4,2.49, height 4.11
SLIN-GRPB031VWVN-RC_V [mm] "Header, 3-Leads, Body 3.81x2.14mm, Pitch 1.27mm"
  rect 1.05x1.05 hole 0.7: 1(-1.27,0)
  round 1.05 hole 0.7: 2(0,0) 3(1.27,0)
  silkscreen extent -2.47,-1.07 1.91,1.07, body extent -1.9,-1.07 1.91,1.07, height 4
SMD-0805 [mm] "Chip Inductor, 2-Leads, Body 2.0x1.2mm"
  rect 1.15x1 smd: 1(-1.175,0) 2(1.175,0)
  body extent -1,-0.6 1,0.6, height 0.89
TLV62569PDRLR [mm]
  rect 0.66x0.31 smd: 1(-0.735,0.5) 2(-0.735,0) 3(-0.735,-0.5) 4(0.735,-0.5) 5(0.735,0) 6(0.735,0.5)
  silkscreen extent -1.18,-0.97 0.6,1.07, body extent -0.8,-0.8 0.8,0.8, height 0.61
TP-SM-C-100 [mm] "Test Point, Surface Mounting, Circular, Pad Diameter 1mm"
  round 1 smd: 1(0,0)
XC8102_SOT-25_TOR [mil]
  rect 35.28x18 smd paste+0 mask+0: 1(-51.14,37.4) 2(-51.14,0) 3(-51.14,-37.4) 4(51.14,-37.4) 5(51.14,37.4)
  silkscreen extent -38,-62 38,62, body extent -55,-57 55,57, height 51
XTAL320X150X90 [mil]
  rect 43x75 smd: 1(-48,0) 2(48,0)
  body extent -63,-30 63,29, height 36
XTAL_ECS-80-18-30B-AGN-TR [mm]
  rect 1.6x1.25 smd: 1(-1.85,-1.1) 2(1.85,-1.1) 3(1.85,1.1) 4(-1.85,1.1)
  silkscreen extent -3.07,-1.9 2.5,1.6, body extent -2.5,-1.6 2.5,1.6, height 0.86

## Part data
B1: "RF ANTENNA 2G, 3G, 4G, 5G, DCS, GSM, LTE, PCS, UMTS, Wifi DB Chip SMA Surface Mount", Manufacturer_Name=Ignion, Mouser Part Number=128-NN02-201, Datasheet Link=https://ignion.io/files/UM_NN02-201.pdf, Geometry.Height=1mm, Manufacturer_Part_Number=NN02-201, Mouser Price/Stock=https://www.mouser.co.uk/ProductDetail/Ignion/NN02-201?qs=OlC7AqGiEDkwQ5K6vk7DOw%3D%3D
C1 C4 C8 C9 C50: library part CMP-2000-04979-2, "CAP CER 10UF 10V X5R 0603", Capacitance=10uF, Manufacturer=TDK, Package=C1608-080, Temperature="-55°C to +85°C", Temperature Characteristic=X5R, Temperature Coefficient=15%, Temperature Range High=+85°C, Temperature Range Low=-55°C, Tolerance=10%, Voltage=10V, Automotive=No, Category=Cap, ComponentLink2Description=Datasheet, ComponentLink2URL=https://product.tdk.com/info/en/documents/chara_sheet/C1608X5R1A106K080AC.pdf, Device Class L1="Passive Components", Device Class L2=Capacitors, Device Class L3="Ceramic Capacitors", Digikey Description="CAP CER 10UF 10V X5R 0603", Footprint Url=https://product.tdk.com/info/en/catalog/spec/mlccspec_commercial_general_midvoltage_en.pdf, Height=0.9mm, Ipc Land Pattern Name=CAPC16080X80, Lead Free=Yes, Manufacturer Part Number=C1608X5R1A106K080AC, Material=Ceramic, Mouser Description="CAP CER 10UF 10V X5R 0603", Octopart=https://octopart.com/c1608x5r1a106k080ac-tdk-26013468, RoHS=TRUE, Voltage Rating=10V
C2 C3 C14: library part CMP-2000-06225-3, "None", Capacitance=4.7uF, Case Code (Imperial)=0603, Case Code (Metric)=1608, Dielectric=X5R, Max Operating Temperature=85°C, Min Operating Temperature=-55°C, Package Quantity=1, Resistor Type=Ceramic, Tolerance=10%, Voltage Rating=16V, Case/Package=0603, Construction=Flat, Height=0.8mm, Length=1.6mm, Mount="Surface Mount", Number of Pins=2, Packaging="Tape and Reel", REACH SVHC="No SVHC", RoHS Compliant=Yes, Series=M, Termination=SMD/SMT, Thickness=0.035inch, Voltage Rating (DC)=16V, Width=0.8mm
C5 C10 C15 C16 C27 C28 C29 C42 C49 C51: library part CMP-03422-000048-1, "CAP CER 0.1UF 16V X7R 0402", Capacitance="100 nF", Manufacturer=YAGEO, Package=CC0402, Temperature="-55°C to +125°C", Temperature Characteristic=X7R, Temperature Coefficient=30ppm/°C, Temperature Range High=+125°C, Temperature Range Low=-55°C, Tolerance=0.1, Voltage Rating="16 V", Automotive=No, Automotive Grade=NA, Category=Cap, ComponentLink2Description=Datasheet, ComponentLink2URL=http://www.yageo.com/documents/recent/UPY-GP_NP0_16V-to-50V_16.pdf, Device Class L1="Passive Components", Device Class L2=Capacitors, Device Class L3="Ceramic Capacitors", Digikey Description="CAP CER 0.1UF 16V X7R 0402", Footprint Url=http://www.yageo.com/exep/pages/download/literatures/UPY-C_GEN_24.pdf, Height=0.55mm, Ipc Land Pattern Name=CAPC10050X50, Lead Free=Yes, Manufacturer Part Number=CC0402KRX7R7BB104, Material=Ceramic, Mouser Description="0402 0.1 uF 16 V ±10 % Tolerance X7R SMT Multilayer Ceramic Capacitor", Octopart=https://octopart.com/cc0402krx7r7bb104-yageo-42244624, RoHS=TRUE
C6: library part CMP-2000-06003-1, "Chip Capacitor, 0.47 uF, +/- 10%, 25 V, -55 to 85 degC, 0402 (1005 Metric), RoHS, Tape and Reel", Capacitance=0.47µF, Manufacturer=TDK, Operating Temperature=-55°C~85°C, Package / Case=0402(1005Metric), Package Description="2-Pin Surface Mount Device, Body 1.00 x 0.50 mm", Package Reference=0402, PCN Part Number=MLCCPartNumberChange30/Nov/2012, Standard Package=1, Temperature Coefficient=X5R, Tolerance=±10%, Voltage - Rated=25V, Applications=GeneralPurpose, Category=Capacitors, Datasheet URL=https://product.tdk.com/info/en/catalog/datasheets/mlcc_commercial_general_en.pdf, Datasheet Version=08/2016, EDA / CAD Models=DownloadfromAcceleratedDesigns, Family=CeramicCapacitors, Features=LowESL, Kits="445-9021-KIT-ND / -KITMLCC100PF-10UF04026.3-50V", Manufacturer URL=http://www.tdk.com/, Mounting Technology=SurfaceMount, Mounting Type=SurfaceMount,MLCC, Online Catalog=CSeries,GeneralPurpose, Other Names=445-8020-1, Packaging=CutTape(CT), Product Training Modules=CSeriesGeneralApplicationsSEAT,CCV,andTVCLDesignToolsGuidetoReplacinganElectrolyticCapacitorwithanMLCC, RoHS Information=RoHSCertificate-MLCC, Series=C, Size / Dimension="0.039\"Lx0.020\"W(1.00mmx0.50mm)"
C7: library part CMP-2100-03591-2, "CAP CER 1UF 6.3V X5R 0402", Capacitance="1 uF", Manufacturer=YAGEO, Package=CC0402, Temperature="-55°C to +125°C", Temperature Characteristic=X5R, Temperature Coefficient=30ppm/°C, Temperature Range High=+125°C, Temperature Range Low=-55°C, Tolerance=0.1, Voltage Rating="6.3 V", Automotive=No, Automotive Grade=NA, Category=Cap, ComponentLink2Description=Datasheet, ComponentLink2URL=http://www.yageo.com/documents/recent/UPY-GP_NP0_16V-to-50V_16.pdf, Device Class L1="Passive Components", Device Class L2=Capacitors, Device Class L3="Ceramic Capacitors", Digikey Description="CAP CER 1UF 6.3V X5R 0402", Footprint Url=http://www.yageo.com/exep/pages/download/literatures/UPY-C_GEN_24.pdf, Height=0.55mm, Ipc Land Pattern Name=CAPC10050X50, Lead Free=Yes, Manufacturer Part Number=CC0402KRX5R5BB105, Material=Ceramic, Mouser Description="Multilayer Ceramic Capacitors MLCC - SMD/SMT 1uF 6.3V X5R 10%", Octopart=https://octopart.com/cc0402krx5r5bb105-yageo-42244618, RoHS=TRUE
C11: library part CMP-2008-02568-2, Capacitance=NC, Case Code (Imperial)=0402, Case Code (Metric)=1005, Dielectric=C0G, Insulation Resistance=1GR, Max Operating Temperature=125°C, Min Operating Temperature=-55°C, Package Quantity=1, Temperature Coefficient=30ppm/°C, Tolerance=5%, Voltage=50V, Case/Package=0402, Construction=Flat, Contact Plating=Tin, Depth=0.5mm, Dissipation Factor=2.5%, Height=0.56mm, Lead Free="Lead Free", Length=1mm, Mount="Surface Mount", Packaging="Tape and Reel", Radiation Hardening=No, REACH SVHC="No SVHC", RoHS Compliant=Yes, Series=-, Termination=SMD/SMT, Thickness=0.022inch, Voltage Rating=50V, Voltage Rating (DC)=50V, Width=0.02inch
C12 C46: library part CMP-2008-02568-2, "CAP CER 100PF 50V C0G/NP0 0402", Capacitance=100pF, Case Code (Imperial)=0402, Case Code (Metric)=1005, Dielectric=C0G, Insulation Resistance=1GR, Max Operating Temperature=125°C, Min Operating Temperature=-55°C, Package Quantity=1, Temperature Coefficient=30ppm/°C, Tolerance=5%, Voltage=50V, Case/Package=0402, Construction=Flat, Contact Plating=Tin, Depth=0.5mm, Dissipation Factor=2.5%, Height=0.56mm, Lead Free="Lead Free", Length=1mm, Mount="Surface Mount", Packaging="Tape and Reel", Radiation Hardening=No, REACH SVHC="No SVHC", RoHS Compliant=Yes, Series=-, Termination=SMD/SMT, Thickness=0.022inch, Voltage Rating=50V, Voltage Rating (DC)=50V, Width=0.02inch
C13 C24 C25 C26 C40 C43 C45: library part CMP-08246-002727-1, "Multilayer Ceramic Capacitors 1μF ±10% 16V X7R SMD 0603", Capacitance=1uF, Case Code (Imperial)=0603, Case Code (Metric)=1608, Dielectric=X7R, Dielectric Material=Ceramic, Max Operating Temperature=125°C, Min Operating Temperature=-55°C, Package Quantity=1, Tolerance=10%, Voltage=16V, Case/Package=0603, Construction=Flat, Depth=0.8mm, Height=0.8mm, Lead Free="Lead Free", Length=1.6mm, Mount="Surface Mount", Packaging="Tape and Reel", Radiation Hardening=No, REACH SVHC="No SVHC", Resistor Type=Ceramic, RoHS Compliant=Yes, Series=C, Termination=SMD/SMT, Thickness=0.037inch, Voltage Rating=16V, Voltage Rating (DC)=16V, Weight=7.1E-05oz, Width=0.031inch
C17: library part CMP-2008-03761-2, "Multi-Layer Ceramic Capacitor 0.8pF C0G  ±0.05pF 0402 Paper T/R", Capacitance=0.8pF, Case Code (Imperial)=0402, Case Code (Metric)=1005, Dielectric=C0G, Max Operating Temperature=125°C, Min Operating Temperature=-55°C, Package Quantity=10000, Voltage Rating=50V, Case/Package=0402, Depth=0.5mm, Height=0.5mm, Length=1mm, Mount="Surface Mount", Packaging="Tape and Reel", Radiation Hardening=No, Termination=SMD/SMT, Thickness=0.022inch, Voltage Rating (DC)=50V, Width=0.02inch
C18 C19 C20 C21 C32 C33 C34 C36 C37 C38 C41: library part CMP-2008-03799-2, "Multi-Layer Ceramic Capacitor 12pF C0G  ±2% 0402 Paper T/R", Capacitance=12pF, Case Code (Imperial)=0402, Case Code (Metric)=1005, Dielectric=C0G, Max Operating Temperature=125°C, Min Operating Temperature=-55°C, Package Quantity=10000, Tolerance=2%, Voltage Rating=50V, Case/Package=0402, Depth=0.5mm, Height=0.5mm, Lead Free="Lead Free", Length=1mm, Mount="Surface Mount", Packaging="Tape and Reel", Radiation Hardening=No, Termination=SMD/SMT, Thickness=0.022inch, Voltage Rating (DC)=50V, Width=0.5mm
C22 C30: library part CMP-08246-002720-1, "Multilayer Ceramic Capacitors 33μF ±20% 10V X5R SMD 0805", Capacitance=33uF, Case Code (Imperial)=0805, Case Code (Metric)=2012, Dielectric=X5R, Dielectric Material=Ceramic, Max Operating Temperature=85°C, Min Operating Temperature=-55°C, Package Quantity=1, Tolerance=20%, Voltage Rating=10V, Case/Package=0805, Depth=1.25mm, Height=1.25mm, Lead Free="Lead Free", Length=2mm, Mount="Surface Mount", Packaging="Tape and Reel", REACH SVHC="No SVHC", Resistor Type=Ceramic, RoHS Compliant=Yes, Series=C, Termination=SMD/SMT, Thickness=0.057inch, Voltage Rating (DC)=10V, Weight=0.000194oz, Width=0.049inch
C23 C31 C35 C44: library part CMP-2008-04254-2, "Chip Multilayer Ceramic Capacitors for General Purpose, 0402, 1000pF, C0G, 30ppm/°C, 5%, 50V", Capacitance=1nF, Case Code (Imperial)=0402, Case Code (Metric)=1005, Dielectric=C0G, Dielectric Material=Ceramic, Insulation Resistance=10GR, Max Operating Temperature=125°C, Min Operating Temperature=-55°C, Package Quantity=1, Temperature Coefficient=30ppm/°C, Tolerance=5%, Voltage=50V, Case/Package=0402, Depth=0.5mm, Height=0.5mm, Lead Free="Lead Free", Length=1mm, Material=Ceramic, Mount="Surface Mount", Number of Pins=2, Packaging="Tape and Reel", Radiation Hardening=No, REACH SVHC="No SVHC", Termination=SMD/SMT, Thickness=0.022inch, Voltage Rating=50V, Voltage Rating (DC)=50V, Width=0.5mm
C39: library part CMP-1035-02799-1, "CAP 10uF 10V ±10% 0603 (1608 Metric) Thickness 1mm SMD", Case-EIA=0603, Case-Metric=1608, Rated Voltage="10 V", Tolerance=Â±10%, Max Thickness="1 mm", Technology=SMT
C47 C48: library part CMP-08246-002299-1, "Cap Ceramic 2.2uF 16V X5R 10% Pad SMD 0603 +85°C Automotive T/R", Capacitance=2.2uF, Case Code (Imperial)=0603, Case Code (Metric)=1608, Dielectric=X5R, Max Operating Temperature=85°C, Min Operating Temperature=-55°C, Package Quantity=1, Ratings=AEC-Q200, Tolerance=10%, Voltage Rating=16V, Case/Package=0603, Composition=Ceramic, Depth=0.8mm, Height=0.8mm, Length=1.6mm, Mount="Surface Mount", Packaging="Tape and Reel", Radiation Hardening=No, REACH SVHC="No SVHC", Termination=SMD/SMT, Thickness=0.035inch, Voltage Rating (DC)=16V, Weight=7.1E-05oz, Width=0.031inch
D1 D2: library part CMP-44529-000045-1, "LED GREEN CLEAR 1608 SMD", Case Code (Imperial)=0603, Case Code (Metric)=1608, Color=Green, Forward Voltage=2.65V, Lens Color=Colorless, Test Current=2mA, Case/Package=0603, Dominant Wavelength=525nm, Height=0.75mm, Length=1.6mm, Lens Size=0.7mm, Lens Style=Round, Lens Transparency=Clear, Luminous Intensity=180mcd, Mount="Surface Mount", Packaging="Tape and Reel", Viewing Angle=100°, Width=0.8mm
FB1 FB2 FB3: library part CMP-0686-00058-2, "Chip Ferrite Bead for Power lines and Signal Lines, 80 Ohm, 500 mA, -55 to 125 degC, 0.6 x 0.3 x 0.33 mm SMD, Tape and Reel", Case Code (Imperial)=0201, Case Code (Metric)=0603, Current Rating=500mA, DC Resistance="0.18 Ohm Max.", DC Resistance (DCR)=180mR, Manufacturer=Murata, Max Operating Temperature=125°C, Min Operating Temperature=-55°C, Operating Temperature Range="-55 to 125 degC", Package Quantity=1, Rated Current="500 mA", Supplier Part Number 1=490-5621-1-ND, Test Frequency=100MHz, Tolerance=25%, Case/Package=0201, Category=Inductors, ComponentLink1Description="Manufacturer URL", ComponentLink1URL=http://www.murata.com/, ComponentLink2Description=Datasheet, ComponentLink2URL=http://www.murata.com/products/catalog/pdf/c31e.pdf, ComponentLink3Description="Package Specification", ComponentLink3URL=http://www.murata.com/products/catalog/pdf/c31e.pdf, ComponentLink4Description=https://datasheet.ciiva.com/1013/l0110s0100blm03ax-1013986.pdf?src-supplier=Digi-Key, ComponentLink4URL=https://datasheet.ciiva.com/1013/l0110s0100blm03ax-1013986.pdf?src-supplier=Digi-Key, ComponentLink5Description=https://datasheet.ciiva.com/41449/001172131-da-01-en-drossel-0201-80r-0-6x0-3mm-15000st-41449422.pdf?src-supplier=Conrad, ComponentLink5URL=https://datasheet.ciiva.com/41449/001172131-da-01-en-drossel-0201-80r-0-6x0-3mm-15000st-41449422.pdf?src-supplier=Conrad, ComponentLink6Description=https://datasheet.ciiva.com/1013/l0110e-1013987.pdf?src-supplier=Digi-Key, ComponentLink6URL=https://datasheet.ciiva.com/1013/l0110e-1013987.pdf?src-supplier=Digi-Key, ComponentLink7Description=https://datasheet.ciiva.com/1013/l0110e-1013988.pdf?src-supplier=Digi-Key, ComponentLink7URL=https://datasheet.ciiva.com/1013/l0110e-1013988.pdf?src-supplier=Digi-Key, ComponentLink8Description=https://datasheet.ciiva.com/46423/1851884-46423882.pdf?src-supplier=Element14, ComponentLink8URL=https://datasheet.ciiva.com/46423/1851884-46423882.pdf?src-supplier=Element14, DatasheetVersion=08/2013, Height=0.3mm, Impedance=80R, Impedance (at 100 MHz)="80 Ohm +/- 25%", Length=0.6mm, Manufacturer Part Number=BLM03AX800SN1D, Material=Steel, Max Current Rating=500mA, Max DC Current=500mA, Mounting Technology="Surface Mount", Number of Circuits=1, Number of Lines=1, Number of Pins=2, PackageDescription="2-Pin Chip, Body 0.6 x 0.3 mm", PackageReference=BLM03-2, Packaging="Tape and Reel", Packing="Tape and Reel", PartNumber=BLM03AX800SN1D, Pricing 1="1=0.19000, 10=0.15200, 25=0.11840, 50=0.09820, 100=0.08470, 250=0.06776, 500=0.06098, 1000=0.05082, 5000=0.04743 (USD)", REACH SVHC="No SVHC", RoHS=Yes, Stock 1=13310, Supplier 1=Digi-Key, Termination=SMD/SMT, Width=0.3mm
J1: library part CMP-1502-03253-1, "Micro USB 2.0 Type B Receptacle WR-COM, Horizontal, SMT, with Pads and Pegs", Contact Resistance=30mOhm, Manufacturer="Wurth Elektronik", Operating Temperature=-40to105degC, Rated Current=1A, Working Voltage=30VAC, Connector Type=MicroUSB2.0TypeB, Datasheet URL=https://katalog.we-online.de/em/datasheet/629105136821.pdf, Gender=Receptacle, Manufacturer URL=http://www.we-online.de, Mounting Technology=SMT, Orientation=Horizontal, Package Reference=629105136821, Packaging=TapeandReel, Part Number=629105136821, Publisher=WurthElektronik
J2: library part DF52-2S-0.8H_21_, "Connector", Manufacturer_Name=Hirose, Mouser Part Number=798-DF52-2S-0.8H21, Datasheet Link=https://datasheet.datasheetarchive.com/originals/distributors/DKDS-30/591726.pdf, Height=1mm, Manufacturer_Part_Number=DF52-2S-0.8H(21), Mouser Price/Stock=https://www.mouser.co.uk/ProductDetail/Hirose-Connector/DF52-2S-0.8H21?qs=%2FKR40Cd6GUpAHUMGMtWbig%3D%3D
J3 J4: "Conn Socket and Terminal Strip HDR/SKT 40 POS 0.5mm Solder ST SMD T/R", Housing Color=Black, Manufacturer=Samtec, Max Operating Temperature=125°C, Min Operating Temperature=-55°C, Supplier Part Number 1=SAM13196CT-ND, Category=Connectors, ComponentLink1Description=http://www.farnell.com/datasheets/2372721.pdf?src-supplier=Farnell, ComponentLink1URL=http://www.farnell.com/datasheets/2372721.pdf?src-supplier=Farnell, ComponentLink2Description=http://www.farnell.com/datasheets/2000266.pdf?src-supplier=Farnell, ComponentLink2URL=http://www.farnell.com/datasheets/2000266.pdf?src-supplier=Farnell, ComponentLink3Description=http://components.arrow.com/part/dataview/0323_01943898?src-supplier=Arrow+Europe, ComponentLink3URL=http://components.arrow.com/part/dataview/0323_01943898?src-supplier=Arrow+Europe, ComponentLink4Description=http://components.arrow.com/part/dataview/48680868S8397842N1004?src-supplier=Arrow+Electronics, ComponentLink4URL=http://components.arrow.com/part/dataview/48680868S8397842N1004?src-supplier=Arrow+Electronics, ComponentLink5Description=http://www.farnell.com/datasheets/2000266.pdf?src-supplier=Element14, ComponentLink5URL=http://www.farnell.com/datasheets/2000266.pdf?src-supplier=Element14, ComponentLink6Description=http://suddendocs.samtec.com/prints/lshm-1xx-xx.x-xx-dv-a-x-x-tr-mkt.pdf?src-supplier=Digi-Key, ComponentLink6URL=http://suddendocs.samtec.com/prints/lshm-1xx-xx.x-xx-dv-a-x-x-tr-mkt.pdf?src-supplier=Digi-Key, ComponentLink7Description=ftp://ftp.samtec.com/webfiles/PDF/LSHM.PDF?src-supplier=Avnet, ComponentLink7URL=ftp://ftp.samtec.com/webfiles/PDF/LSHM.PDF?src-supplier=Avnet, ComponentLink8Description=ftp://ftp.samtec.com/webfiles/PDF/LSHM.PDF?src-supplier=Avnet+Europe, ComponentLink8URL=ftp://ftp.samtec.com/webfiles/PDF/LSHM.PDF?src-supplier=Avnet+Europe, ComponentLink9Description=http://www.farnell.com/datasheets/2372721.pdf?src-supplier=Newark, ComponentLink9URL=http://www.farnell.com/datasheets/2372721.pdf?src-supplier=Newark, Contact Material=Bronze, Contact Plating=Gold, Depth=4.98mm, Housing Material=Polymer, Length=14.7mm, Manufacturer Part Number=LSHM-120-02.5-L-DV-A-N-K-TR, Number of Contacts=40, Number of Rows=2, Orientation=Straight, Packaging="Tape and Reel", Pitch=0.5mm, Pricing 1="1=6.60000, 10=5.97000, 25=5.63960, 50=5.50200, 100=5.22690, 250=4.67672 (USD)", Radiation Hardening=No, REACH SVHC="No SVHC", RoHS=Yes, RoHS Compliant=Yes, Series=LSH, Stock 1=3008, Supplier 1=Digi-Key, Termination=Solder
J5: "6 Position Socket Connector Surface Mount, Right Angle", Package=None, Availability=Unavailable, MF=Hirose, MP=DF52-6S-0.8H_21_, Price=None, SnapEDA_Link=https://www.snapeda.com/parts/DF52-6S-0.8H%2821%29/Hirose%20Electric%20Co%20Ltd/view-part/624923/?ref=snap
L1 L2: library part CMP-01651-1, "2.2µH Shielded Wirewound Inductor 1.8A 116mOhm Max 0806 (2016 Metric)", Current - Saturation=2.4A, Current Rating (Amps)=1,8A, DC Resistance (DCR)="116mOhm Max", Frequency - Self Resonant=-, Inductance=2,2µH, Inductance Frequency - Test=1MHz, Manufacturer="Murata Electronics", Manufacturer Part Number=DFE201612E-2R2M=P2, Operating Temperature="-40°C ~ 125°C", Package / Case="0806 (2016 Metric)", Supplier Device Package=0806, Tolerance=±20%, Features=-, Material - Core=Metal, Mounting Type="Surface Mount", Packaging="Tape & Reel (TR)", Part Status=Active, Q @ Freq=-, Ratings=-, Series=DFE201612E, Shielding=Shielded, Type=Wirewound